# Altium PCB DRVS-PCB.PcbDoc (part 1 of 3)
Units mm, origin at the board's own origin, x right, y up, seen from the top; angles counter-clockwise.
Board outline 50.67 x 58.05 mm, 4 copper layers (Top Layer, Layer 1, Layer 2, Bottom Layer), stack 1.553 mm thick; 72 components, 76 nets, 302 pads, 127 vias.
Unrouted connection lines stored in the file: 20.
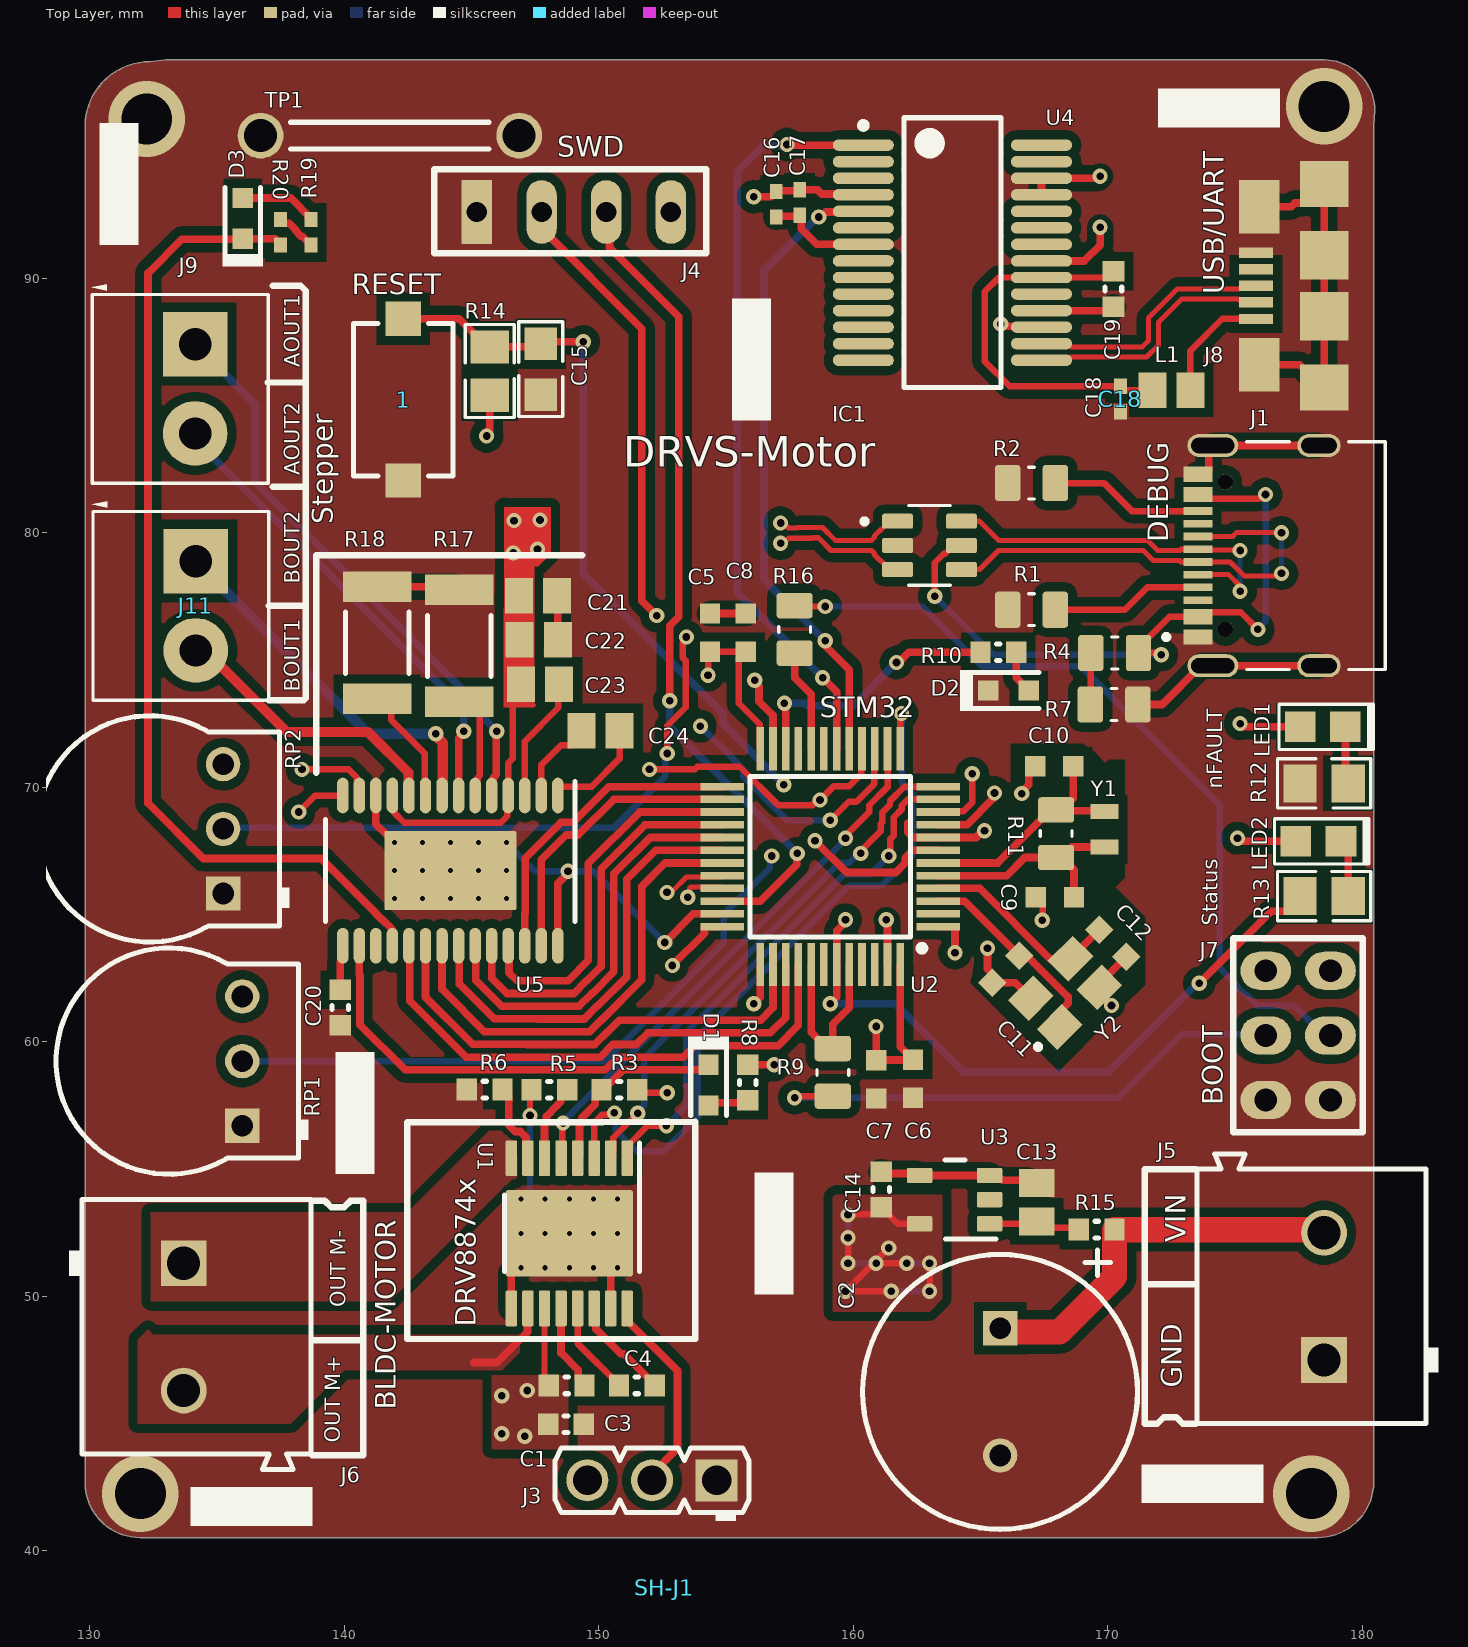
[diagram p0: Top Layer view]
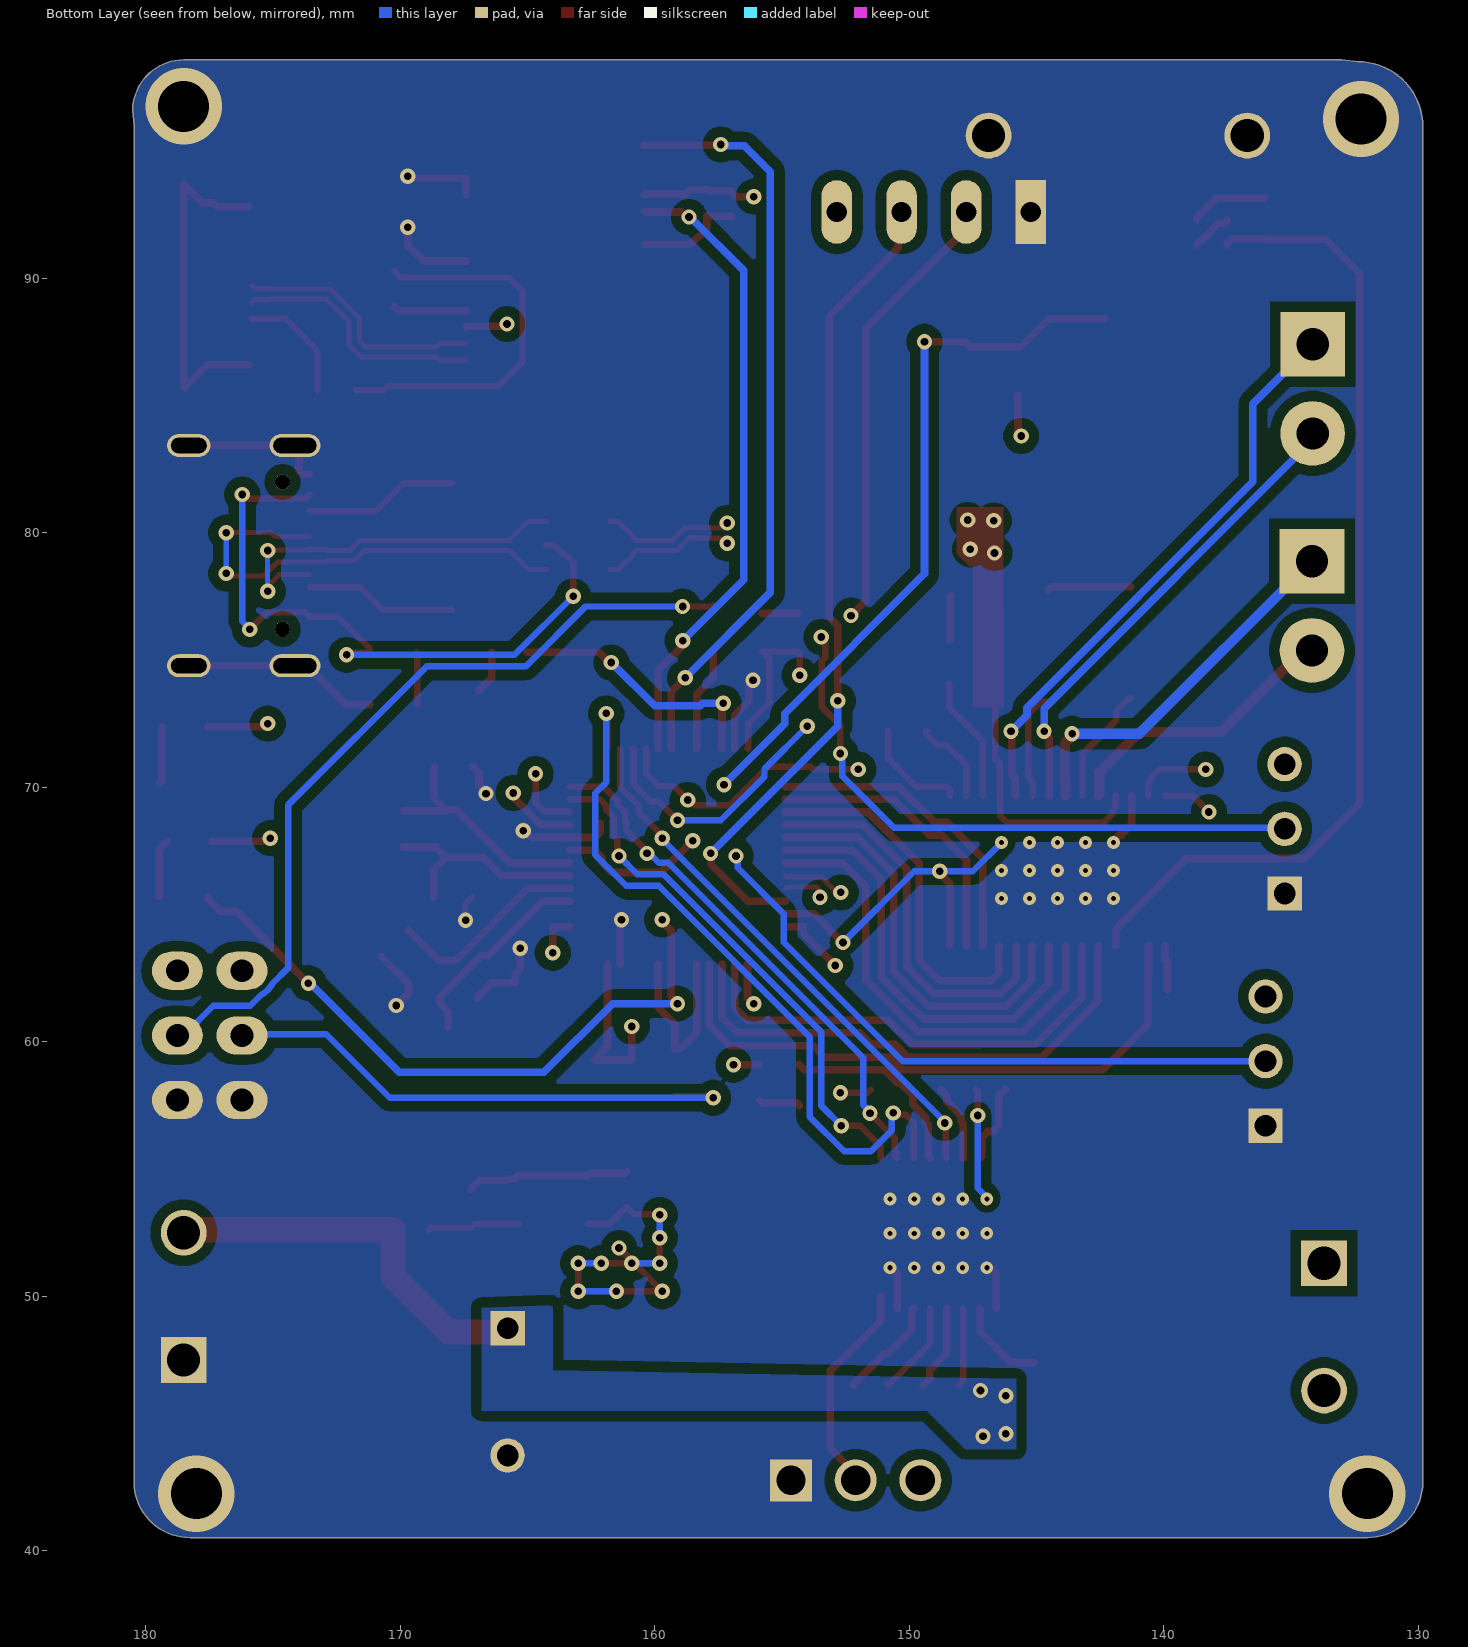
[diagram p1: Bottom Layer view, seen from below]
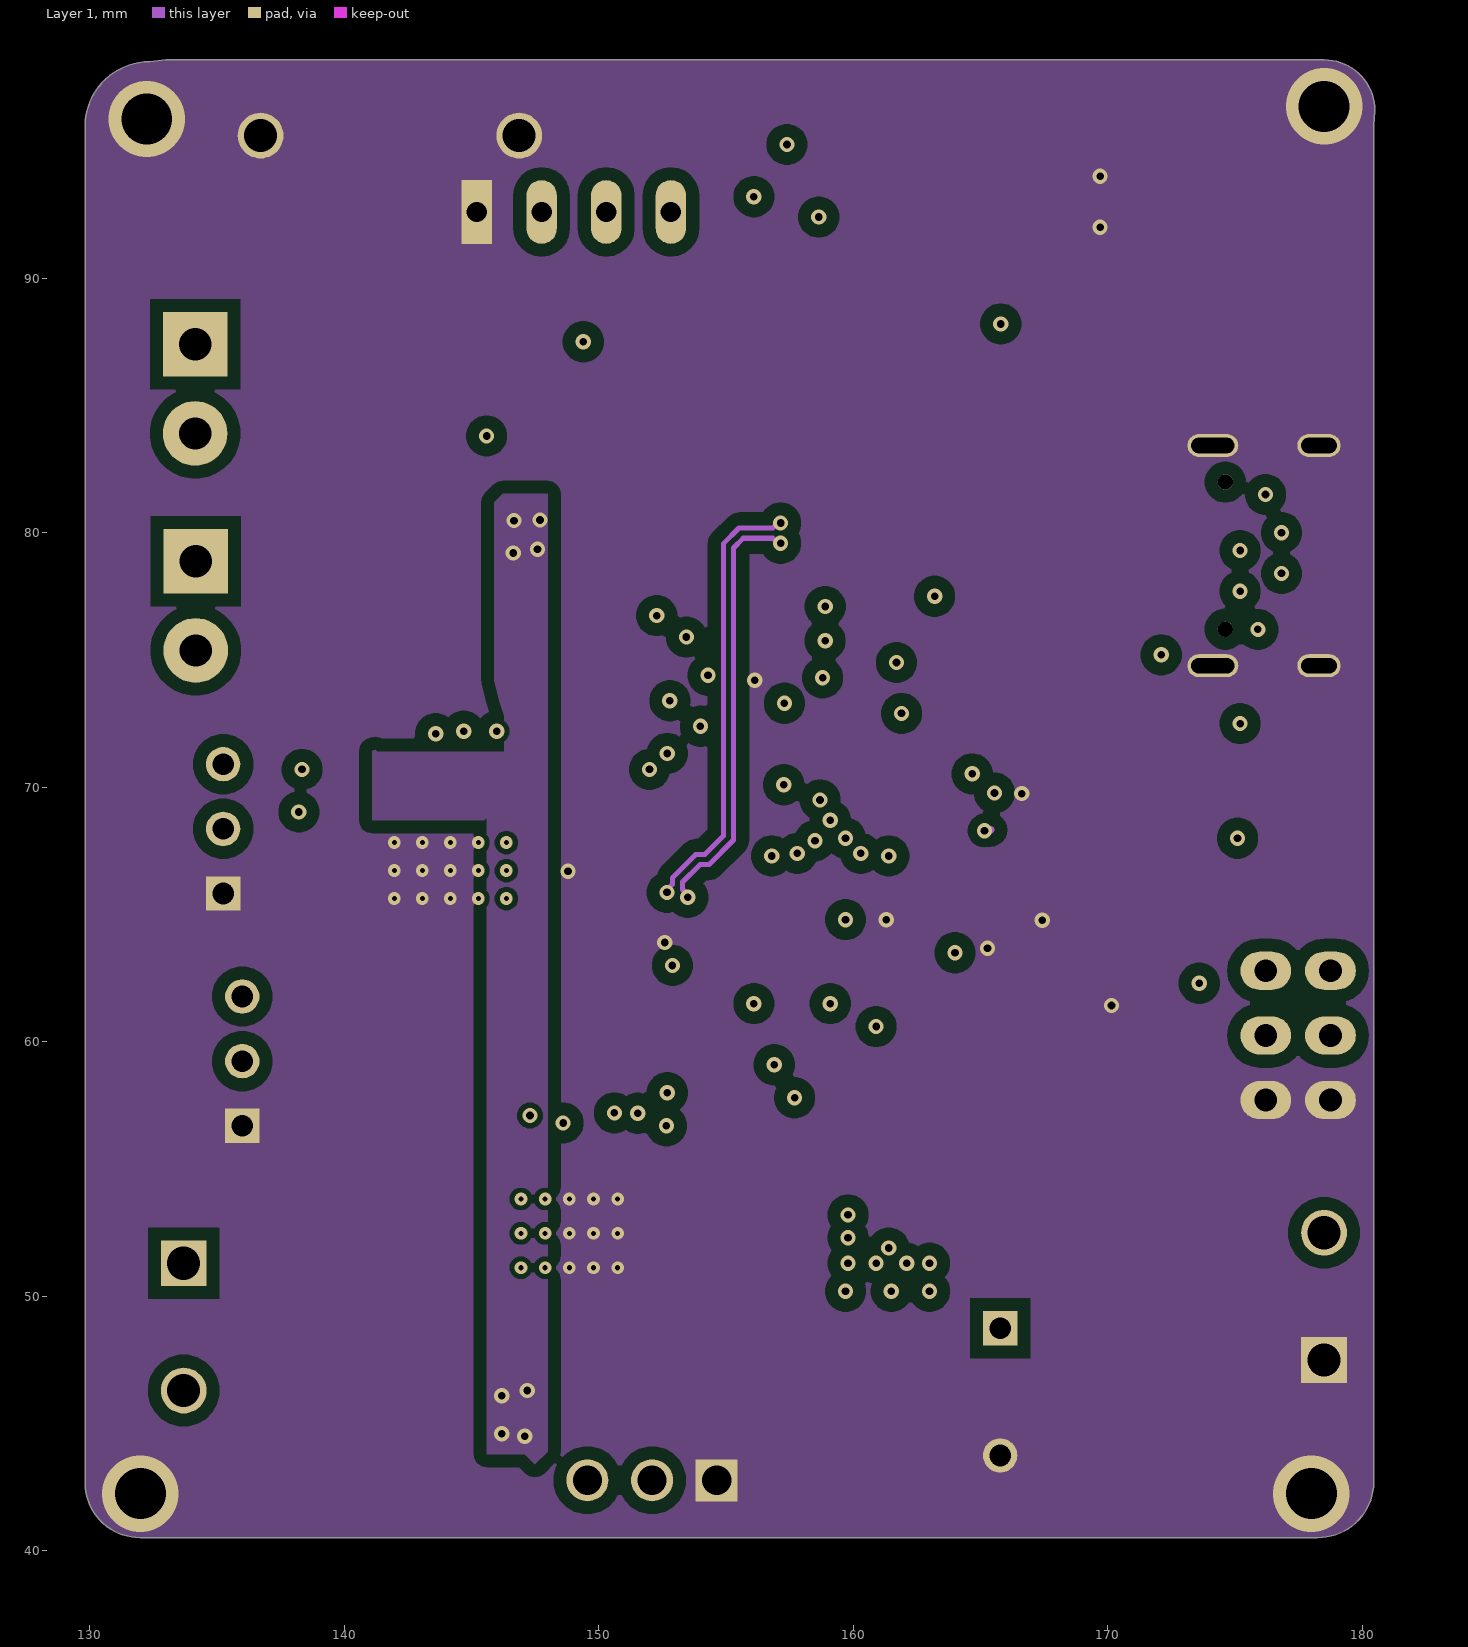
[diagram p2: Layer 1]
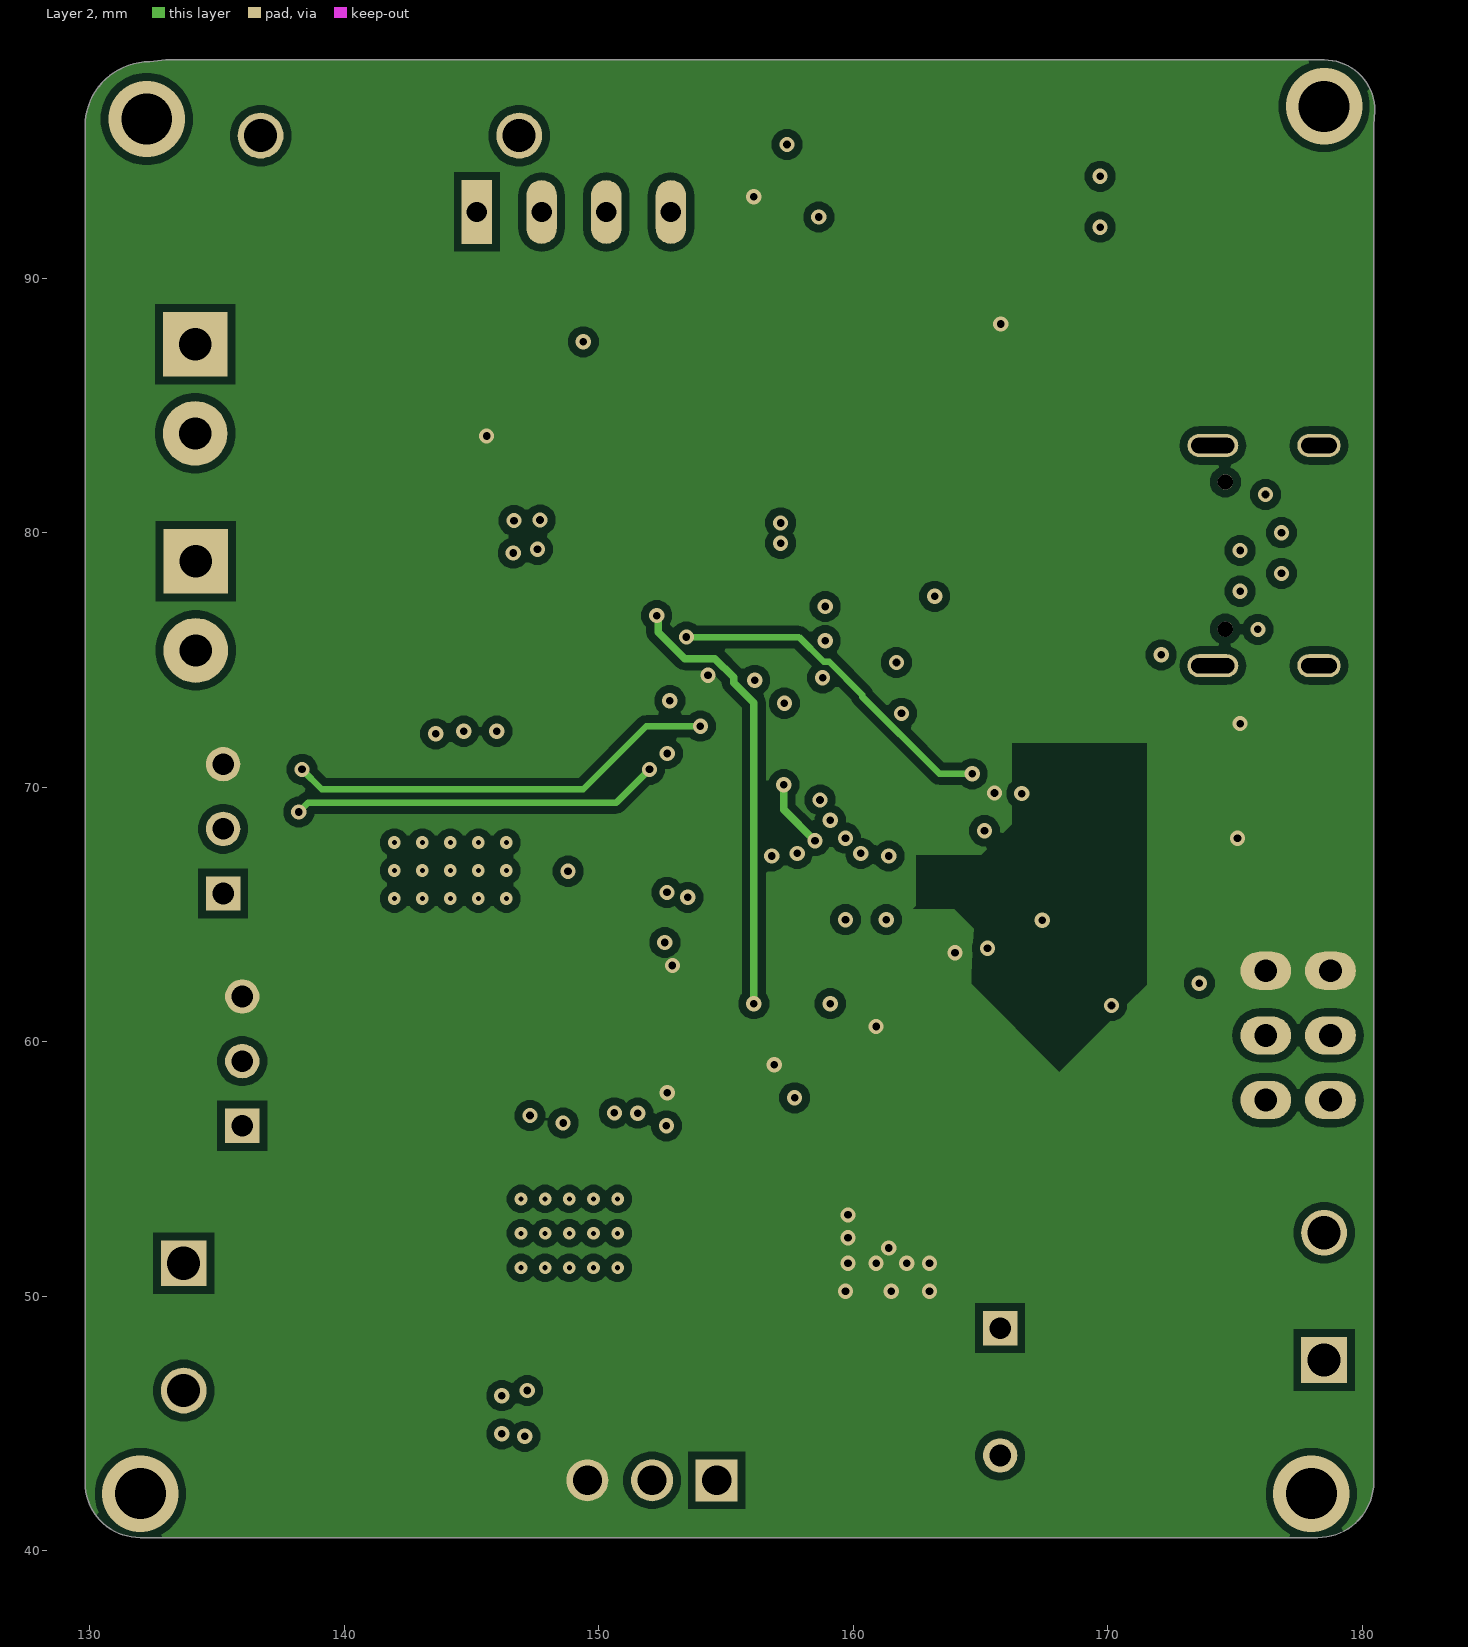
[diagram p3: Layer 2]
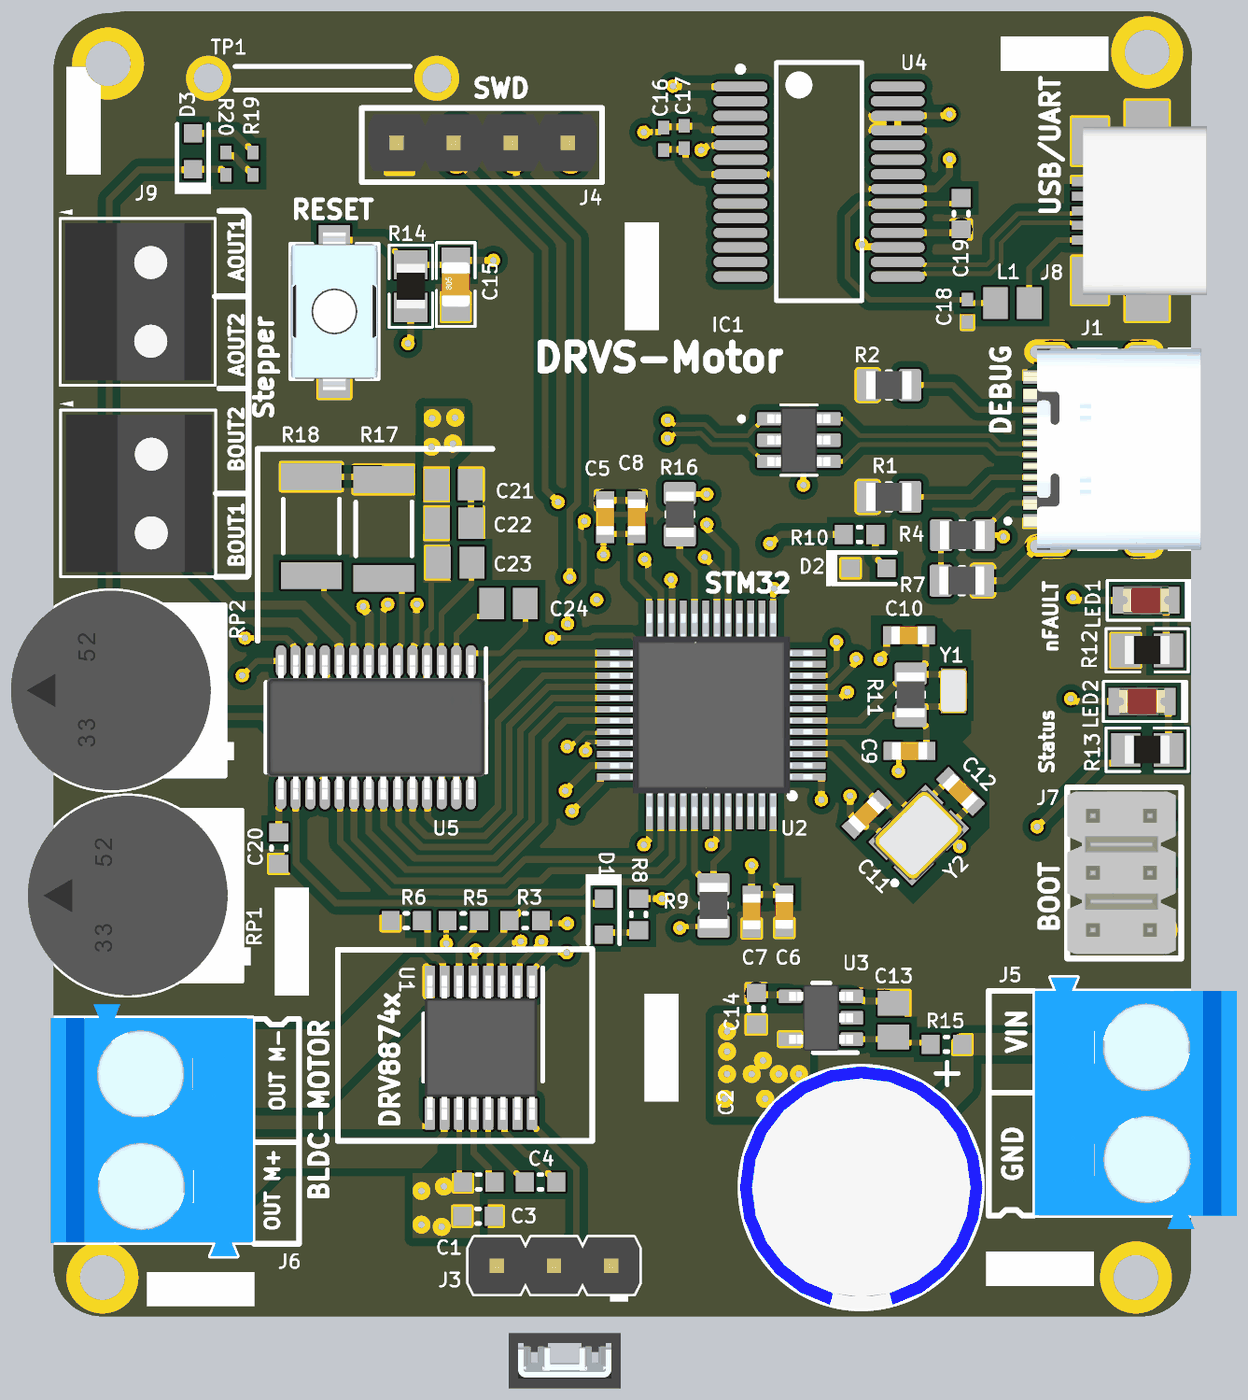
[diagram p5: 3D render of the assembled board from above, using the file's embedded part models]

## Layer stack, top to bottom
Top Solder: solder mask 0.0102, Solder Resist, Dk 3.5
Top Layer: signal copper 0.0711
Dielectric 2: prepreg 0.2896, FR4 370, Dk 3.8
Layer 1: signal copper 0.035
Dielectric 1: dielectric 0.762, FR4 370, Dk 4.8
Layer 2: signal copper 0.035
Dielectric 3: prepreg 0.2896, FR4 370, Dk 3.8
Bottom Layer: signal copper 0.0711
Bottom Solder: solder mask 0.0102, Solder Resist, Dk 3.5

## Board outline
129.825,42.675 ccw(c131.987,42.687) 132,40.525 178.25,40.525 ccw(c178.263,42.712) 180.45,42.7 180.45,96 180.5,96.575 ccw(c178.5,96.575) 178.5,98.575 133,98.575 132.365,98.5 ccw(c132.365,95.96) 129.825,95.96

## Design rules (kind name [scope] priority, off if disabled: settings)
Clearance BOT-L4 [InNamedPolygon('GND_L04_P020')] p1: gap=0.4 ignorepadtopadclearanceinfootprint=FALSE
Clearance inner-L3-VCC [InNamedPolygon('VCC_L03_P019')] p2: gap=0.3 ignorepadtopadclearanceinfootprint=FALSE
Clearance INNER-L2 [InNamedPolygon('GND_L02_P017')] p3: gap=0.5 ignorepadtopadclearanceinfootprint=FALSE
Clearance TOP-L1 [InNamedPolygon('GND_L01_P016')] p4: gap=0.35 ignorepadtopadclearanceinfootprint=FALSE
Clearance [All] p5: gap=0.2 ignorepadtopadclearanceinfootprint=TRUE
DiffPairsRouting DiffPair_DiffPairsRouting [InDifferentialPairClass('DIFFPAIR-90-USB')] p1: maxlimit=0.2 minlimit=0.2 mostfreqgap=0.2 toplayer_minwidth=0.2 toplayer_maxwidth=0.2 toplayer_prefwidth=0.2 midlayer1_minwidth=0.2 midlayer1_maxwidth=0.2 midlayer1_prefwidth=0.2 midlayer2_minwidth=0.2 midlayer2_maxwidth=0.2 midlayer2_prefwidth=0.2 bottomlayer_minwidth=0.2 bottomlayer_maxwidth=0.2 bottomlayer_prefwidth=0.2 maxuncoupledlength=12.7
DiffPairsRouting DiffPair_DiffPairsRouting_1 [InDifferentialPairClass('Diff-90-USB')] p2: maxlimit=0.2 minlimit=0.2 mostfreqgap=0.2 toplayer_minwidth=0.2 toplayer_maxwidth=0.2 toplayer_prefwidth=0.2 midlayer1_minwidth=0.2 midlayer1_maxwidth=0.2 midlayer1_prefwidth=0.2 midlayer2_minwidth=0.2 midlayer2_maxwidth=0.2 midlayer2_prefwidth=0.2 bottomlayer_minwidth=0.2 bottomlayer_maxwidth=0.2 bottomlayer_prefwidth=0.2 maxuncoupledlength=12.7
DiffPairsRouting DiffPair_DiffPairsRouting_2 [InDifferentialPairClass('Diff-90-USB')] p3: maxlimit=0.254 minlimit=0.254 mostfreqgap=0.254 toplayer_minwidth=0.381 toplayer_maxwidth=0.381 toplayer_prefwidth=0.381 midlayer1_minwidth=0.381 midlayer1_maxwidth=0.381 midlayer1_prefwidth=0.381 midlayer2_minwidth=0.381 midlayer2_maxwidth=0.381 midlayer2_prefwidth=0.381 bottomlayer_minwidth=0.381 bottomlayer_maxwidth=0.381 bottomlayer_prefwidth=0.381 maxuncoupledlength=12.7
DiffPairsRouting [All] p4: maxlimit=0.254 minlimit=0.254 mostfreqgap=0.254 toplayer_minwidth=0.381 toplayer_maxwidth=0.381 toplayer_prefwidth=0.381 midlayer1_minwidth=0.381 midlayer1_maxwidth=0.381 midlayer1_prefwidth=0.381 midlayer2_minwidth=0.381 midlayer2_maxwidth=0.381 midlayer2_prefwidth=0.381 bottomlayer_minwidth=0.381 bottomlayer_maxwidth=0.381 bottomlayer_prefwidth=0.381 maxuncoupledlength=12.7
HoleSize [All] p1: absolutevalues=TRUE maxlimit=2 minlimit=0.1 maxpercent=80.000 minpercent=20.000
HoleToHoleClearance [All] p1: gap=0.1 allowstackedmicrovias=TRUE
MatchedLengths DiffPair_MatchedLengths [InDifferentialPairClass('DIFFPAIR-90-USB')] p1: tolerance=25.4 checknetsindiffpair=FALSE checkdiffpairvsdiffpair=TRUE checkxsignals=TRUE checkothers=TRUE
MatchedLengths DiffPair_MatchedLengths_1 [InDifferentialPairClass('Diff-90-USB')] p2: tolerance=25.4 checknetsindiffpair=FALSE checkdiffpairvsdiffpair=TRUE checkxsignals=TRUE checkothers=TRUE
MatchedLengths DiffPair_MatchedLengths_2 [InDifferentialPairClass('Diff-90-USB')] p3: tolerance=25.4 checknetsindiffpair=FALSE checkdiffpairvsdiffpair=TRUE checkxsignals=TRUE checkothers=TRUE
MinimumSolderMaskSliver [All] p1: minsoldermaskwidth=0.005
NetAntennae [All] p1: netantennaetolerance=0.1
PlaneClearance [All] p1: clearance=0.1
PlaneConnect [All] p1: planeconnectstyle=Direct reliefexpansion=0.508 reliefentries=4 reliefconductorwidth=0.254 reliefairgap=0.254
PolygonConnect [All] p1: connectstyle=Direct reliefconductorwidth=0.254 reliefentries=4 polygonreliefangle="90 Angle" airgapwidth=0.254
RoutingVias [All] p1: holewidth=0.3 width=0.6 viastyle="Through Hole" minholewidth=0.3 minwidth=0.6 maxholewidth=0.3 maxwidth=0.6
SilkToSilkClearance [All] p1: silktosilkclearance=0.01
SilkToSolderMaskClearance [IsPad] p1: minsilkscreentomaskgap=0.005 clearancetoexposedcopper=TRUE
SolderMaskExpansion [All] p1: expansion=0.102 istentingtop=FALSE
Width [All] p1: maxlimit=2 minlimit=0.254 preferedwidth=0.254
21 further rules are at their usual default settings.

## Classes and differential pairs
differential pair class DIFFPAIR-90-USB: USB
differential pair class Diff-90-USB: D USB_Con_C1
component class "usb sheet": C16 C17 C18 C19 J8 L1 U4
component class stepper-schematic: C20 C21 C22 C23 C24 C25 D3 J9 J11 R17 R18 R19 R20 TP1 U5 U6
component class DRVS-SCHEMA: 1 C1 C2 C3 C4 C5 C6 C7 C8 C9 C10 C11 C12 C13 C14 C15 D1 D2 IC1 J1 J3 J4 J5 J6 J7 LED1 LED2 R1 R2 R3 R4 R5 R6 R7 R8 R9 R10 R11 R12 R13 R14 R15 R16 RP1 RP2 SH-J1 U1 U2 U3 Y1 Y2
differential pair USB: +USB_P -USB_N
differential pair USB_Con_C1: +USB_Con_C1_P -USB_Con_C1_N
differential pair D: +D_P -D_N

## Components (designator, comment, footprint, x,y, rotation, side; value= is the part's Value field where it differs from the comment)
1 "434113025826" WS-TASV_L6W3.8H2.5_4341x30258x6 142.325,85.225 r90 top
C1 "885012206095" 0603L 148.746,46.5 r0 top value=0.1uF
C2 "UBT1H101MPD1TD" BT_1000x1250 165.775,46.25 r270 top value=100uF
C3 "885012206095" 0603L 148.72,44.975 r0 top value=0.1uF
C4 "885012206091" 0603L 151.5,46.5 r0 top value=0.022uF
C5 "0.1uF" WCAP-CSST_0603_L1.6W0.8H0.8_Reflow 154.375,76.075 r270 top
C6 "0.1uF" WCAP-CSST_0603_L1.6W0.8H0.8_Reflow 162.35,58.55 r90 top
C7 "0.1uF" WCAP-CSST_0603_L1.6W0.8H0.8_Reflow 160.9,58.525 r90 top
C8 "0.1uF" WCAP-CSST_0603_L1.6W0.8H0.8_Reflow 155.775,76.075 r270 top
C9 "12pF" WCAP-CSST_0603_L1.6W0.8H0.8_Reflow 167.925,65.675 r0 top
C10 "12pF" WCAP-CSST_0603_L1.6W0.8H0.8_Reflow 167.9,70.819 r0 top
C11 "12pF" WCAP-CSST_0603_L1.6W0.8H0.8_Reflow 166,62.85 r45 top
C12 "12pF" WCAP-CSST_0603_L1.6W0.8H0.8_Reflow 170.2,63.875 r135 top
C13 "885012207103" 0805L 167.213,53.7 r90 top value=1uF
C14 "C0603C475K8PACTU" 0603L 161.1,54.2 r90 top value=4.7uF
C15 "0.1uF" CAP_0805 147.725,86.425 r90 top
C16 "GRM155R61A105KE15D" 0402L 156.975,92.9 r270 top value=1uF
C17 "GRM155R61A104KA01D" 0402L 157.9,92.975 r270 top value=0.1uF
C18 "GRM155R61A104KA01D" 0402L 170.5,85.25 r270 top value=0.1uF
C19 "CGB3B1X5R1A475K055AC" 0603L 170.225,89.575 r270 top value=4.7uF
C20 "C0603C474K9RACTU" 0603L 139.85,61.35 r270 top value=0.47uF
C21 "C0805C104K1RACTU" 0805L 147.625,77.525 r180 top value=0.1uF
C22 "C0805C104K1RACTU" 0805L 147.65,75.8 r180 top value=0.1uF
C23 "C2012X7R1E474K" 0805L 147.7,74.05 r180 top value=0.47uF
C24 "C0805C104K1RACTU" 0805L 150.075,72.225 r180 top value=0.1uF
D1 "150060RS75000" WL-SMCW_RED 154.318,58.3 r270 top value=Red
D2 "150060VS75000" WL-SMCW_GREEN 166.1,73.8 r0 top value=Green
D3 "150060RS75000" WL-SMCW_RED 136.025,92.35 r90 top value=Red
IC1 "USBLC6-2SC6" SOT95P280X145-6N 163,79.5 r0 top
J1 "TYPE-C-31-M-12" HRO_TYPE-C-31-M-12 178.3,79.1 r90 top
J3 "61300311121" WURTH_61300311121 152.1,42.776 r180 top
J4 "4X1 Bergstrip" CON4_100_40D72_TH_ST_MALE 145.22,92.6 r90 top
J5 "CMP-0054828-1" Wurth_691101710002 178.5,50 r90 top
J6 "CMP-0054828-1" Wurth_691101710002 133.7,48.8 r270 top
J7 "2X3 Berg Strip" CON6_100_59D78_TH_ST_Duplicate 176.21,62.79 r270 top
J8 "ZX62-B-5PA(11)" CONN_USB_micro_ZX62-B-5PA 175.825,89.7 r90 top
J9 "ED555/2DS" TERM_BLK_ED555-2DS 134.15,87.405 r270 top
J11 "ED555/2DS" TERM_BLK_ED555-2DS 134.175,78.88 r270 top
L1 "MMZ2012R300A" 0805L 172.5,85.6 r0 top value="30 ohm"
LED1 "RED LED" LED_0805 178.45,72.375 r180 top
LED2 "RED LED" LED_0805 178.275,67.875 r180 top
R1 "5.1k" RESC2012X65N 167.006,76.975 r180 top
R2 "5.1k" RESC2012X65N 167.006,81.95 r0 top
R3 "ERA-3ARW103V" 0603L 150.816,58.12 r180 top value=10.0k
R4 "10k" RESC2012X65N 170.275,75.275 r180 top
R5 "CRCW06031K50JNEA" 0603L 148.061,58.12 r0 top value=1.5k
R6 "ERJ-3GEY0R00V" 0603L 145.524,58.125 r0 top value=0
R7 "10k" RESC2012X65N 170.25,73.25 r0 top
R8 "CRCW0603330RJNEA" 0603L 155.864,58.4 r270 top value=330
R9 "10K" RESC2012X65N 159.2,58.8 r270 top
R10 "CRCW0603330RJNEA" 0603L 165.7,75.3 r0 top value=330
R11 "10MΩ" RESC2012X65N 167.975,68.175 r90 top
R12 "1K" RES_0805 178.5,70.15 r180 top
R13 "1K" RES_0805 178.5,65.725 r180 top
R14 "10K" RES_0805 145.725,86.35 r90 top
R15 "ERJ-3GEY0R00V" 0603L 169.567,52.625 r180 top value=0
R16 "10K" RESC2012X65N 157.7,76.2 r270 top
R17 "CSRN2010FKR250" 2010L 144.525,75.55 r270 top value=0.25
R18 "CSRN2010FKR250" 2010L 141.3,75.675 r270 top value=0.25
R19 "CRCW0402510RJNED" 0402L 138.7,91.8 r270 top value=510
R20 "CRCW04024K99FKED" 0402L 137.5,91.8 r90 top value=4.99k
RP1 "3352T-1-503LF" Bourns_3352T 136,59.24 r90 top value=50k
RP2 "3352T-1-503LF" Bourns_3352T 135.25,68.365 r90 top value=50k
SH-J1 "60900213421" Wurth_60900213421 152.575,38.55 r0 top
TP1 "D3082-05" Harwin_D3082-05 141.8,95.6 r0 top
U1 "DRV8874PWPR" PWP0016J_N 148.849,52.475 r270 top
U2 "STM32F103C8T6" LQFP-48_19.6_393_58X11_SMD 159.1,67.275 r180 top
U3 "TPS7B6933DBVR" DBV0005A_N 163.984,53.8 r180 top
U4 "FT232RL" SSOP28_M 163.9,91 r0 top
U5 "DRV8880PWPR" PWP0028C_N 144.175,66.725 r270 top
Y1 "32.768kHz" WE-XTAL_IQXC-25 169.875,68.35 r90 top
Y2 "25MHz" WE-XTAL_CFPX-180 168.325,61.925 r45 top

## Footprints (in the part's own frame and the unit in brackets; to place one, negate y for a bottom-side part, rotate by r counter-clockwise, add the part's x,y. Pads: shape width x height; smd on the part's side, far side on the other; paste and mask are expansions set on the pad)
0402L [mm]
  rect 0.6x0.5 smd: 1(-0.5,0) 2(0.5,0)
  body extent -0.55,-0.3 0.55,0.3, height 0.6
0603L [mm]
  rect 0.8x0.85 smd: 1(-0.7,0) 2(0.7,0)
  silkscreen extent -0.07,-0.32 0.07,0.32, body extent -0.87,-0.47 0.87,0.47, height 1
0805L [mm]
  rect 1.1x1.4 smd: 1(-0.75,0) 2(0.75,0)
  body extent -1.1,-0.72 1.1,0.72, height 1.45
2010L [mm]
  rect 1.2x2.7 smd: 1(-2.2,0) 2(2.2,0)
  silkscreen extent -1.2,-1.25 1.2,1.25, body extent -2.73,-1.45 2.73,1.45, height 1.66
Bourns_3352T [mm]
  rect 1.35x1.35 hole 0.85: 1(-2.54,0)
  round 1.35 hole 0.85: 2(0,0) 3(2.54,0)
  silkscreen extent -4.44,-2.6 4.44,7.31, body extent -4.44,-2.21 4.45,7.32, height 3.81
BT_1000x1250 [mm]
  rect 1.35x1.35 hole 0.85 paste+0: 1(-2.5,0)
  round 1.35 hole 0.85 paste+0: 2(2.5,0)
  silkscreen extent -5.58,-5.4 5.4,5.4, body extent -5.36,-5.39 5.39,5.39, height 14.51
CAP_0805 [mm] "Ceramic Capacitor"
  rect 1.27x1.27 smd mask+0.076: 1(-1,0) 2(1,0)
  silkscreen extent -1.86,-0.86 1.86,0.86, body extent -1,-0.62 1,0.63, height 0.78
CON4_100_40D72_TH_ST_MALE [mm] "Berg Strip"
  rect 2.5x1.2 hole 0.8: 1(0,0)
  oval 2.5x1.2 hole 0.8: 2(0,-2.54) 3(0,-5.08) 4(0,-7.62)
  silkscreen extent -1.63,-9.02 1.68,1.68, body extent -1.14,-8.76 1.4,1.4, height 8.55
CON6_100_59D78_TH_ST_Duplicate [mm] "Berg strip"
  oval 1.5x2 hole 0.9: 1(0,0) 2(0,2.54) 3(2.54,0) 4(2.54,2.54) 5(5.08,0) 6(5.08,2.54)
  silkscreen extent -1.27,-1.27 6.35,3.81, body extent -1.07,-1.27 6.15,3.56, height 8.18
CONN_USB_micro_ZX62-B-5PA [mm]
  rect 0.4x1.35 smd: 1(-1.3,0) 2(-0.65,0) 3(0,0) 4(0.65,0) 5(1.3,0)
  rect 1.9x1.9 smd: 6(-1.2,-2.675) 7(1.2,-2.675)
  rect 1.8x1.9 smd: 8(-4,-2.675) 9(4,-2.675)
  rect 2.1x1.6 smd: 10(-3.1,-0.125) 11(3.1,-0.125)
  body extent -3.75,-5.33 3.75,0.18, height 2.55
DBV0005A_N [mm]
  rrect17% 1x0.6 smd: 1(-1.375,0.95) 2(-1.375,0) 3(-1.375,-0.95) 4(1.375,-0.95) 5(1.375,0.95)
  silkscreen extent -1.62,-1.55 0.38,1.55, body extent -1.42,-1.46 1.42,1.46, height 1.09
Harwin_D3082-05 [mm]
  round 1.8 hole 1.3: 1(-5.08,0) 2(5.08,0)
  silkscreen extent -3.9,-0.53 3.9,0.53, body extent -5.6,-0.52 5.61,0.52, height 6.63
HRO_TYPE-C-31-M-12 [mm]
  rect 0.6x1.14 smd mask+0.05: A1_B12(-3.2,4.75) A4_B9(-2.4,4.75) B1_A12(3.2,4.75) B4_A9(2.4,4.75)
  rect 0.3x1.14 smd mask+0.05: A5(-1.25,4.75) A6(-0.25,4.75) A7(0.25,4.75) A8(1.25,4.75) B5(1.75,4.75) B6(0.75,4.75) B7(-0.75,4.75) B8(-1.75,4.75)
  oval 0.9x2 hole 0.6 slot 1.7 at 90 deg: S1(-4.325,4.17) S2(4.325,4.17)
  oval 0.9x1.7 hole 0.6 slot 1.4 at 90 deg: S3(-4.325,0) S4(4.325,0)
  round 0.6 hole 0.6 unplated: ""(-2.89,3.68) ""(2.89,3.68)
  silkscreen extent -4.47,-2.6 4.47,6.1, body extent -4.47,-2.6 4.47,5.31, height 3.31
LED_0805 [mm] "LED"
  rect 1.2x1.2 smd mask+0.076: A(0.889,0) K(-0.889,0)
  silkscreen extent -1.99,-0.89 1.73,0.89, body extent -1.01,-0.62 1.01,0.63, height 1.1
LQFP-48_19.6_393_58X11_SMD [mm] "48LQFP"
  rect 1.7x0.3 smd mask+0.076: 1(-4.238,2.75) 2(-4.238,2.25) 3(-4.238,1.75) 4(-4.238,1.25) 5(-4.238,0.75) 6(-4.238,0.25) 7(-4.238,-0.25) 8(-4.238,-0.75) 9(-4.238,-1.25) 10(-4.238,-1.75) 11(-4.238,-2.25) 12(-4.238,-2.75) 25(4.238,-2.75) 26(4.238,-2.25) 27(4.238,-1.75) 28(4.238,-1.25) 29(4.238,-0.75) 30(4.238,-0.25) 31(4.238,0.25) 32(4.238,0.75) 33(4.238,1.25) 34(4.238,1.75) 35(4.238,2.25) 36(4.238,2.75)
  rect 0.3x1.7 smd mask+0.076: 13(-2.75,-4.238) 14(-2.25,-4.238) 15(-1.75,-4.238) 16(-1.25,-4.238) 17(-0.75,-4.238) 18(-0.25,-4.238) 19(0.25,-4.238) 20(0.75,-4.238) 21(1.25,-4.238) 22(1.75,-4.238) 23(2.25,-4.238) 24(2.75,-4.238) 37(2.75,4.238) 38(2.25,4.238) 39(1.75,4.238) 40(1.25,4.238) 41(0.75,4.238) 42(0.25,4.238) 43(-0.25,4.238) 44(-0.75,4.238) 45(-1.25,4.238) 46(-1.75,4.238) 47(-2.25,4.238) 48(-2.75,4.238)
  silkscreen extent -3.72,-3.15 3.15,3.72, body extent -4.5,-4.5 4.5,4.5, height 1.7
PWP0016J_N [mm]
  rrect22% 1.4x0.45 smd: 1(-2.95,2.275) 2(-2.95,1.625) 3(-2.95,0.975) 4(-2.95,0.325) 5(-2.95,-0.325) 6(-2.95,-0.975) 7(-2.95,-1.625) 8(-2.95,-2.275) 9(2.95,-2.275) 10(2.95,-1.625) 11(2.95,-0.975) 12(2.95,-0.325) 13(2.95,0.325) 14(2.95,0.975) 15(2.95,1.625) 16(2.95,2.275)
  rrect6% 3.4x5 smd paste-1.7 mask-1.7: 17(0,0)
  rrect50% 2.46x3.55 on Top Paste: 17(0,0)
  rrect50% 2.46x3.55 on Top Solder: 17(0,0)
  silkscreen extent -3.55,-2.55 1.5,2.75, body extent -3.2,-2.5 3.2,2.5, height 1.13
PWP0028C_N [mm]
  rrect100% 1.4x0.45 smd: 1(-2.95,4.225) 2(-2.95,3.575) 3(-2.95,2.925) 4(-2.95,2.275) 5(-2.95,1.625) 6(-2.95,0.975) 7(-2.95,0.325) 8(-2.95,-0.325) 9(-2.95,-0.975) 10(-2.95,-1.625) 11(-2.95,-2.275) 12(-2.95,-2.925) 13(-2.95,-3.575) 14(-2.95,-4.225) 15(2.95,-4.225) 16(2.95,-3.575) 17(2.95,-2.925) 18(2.95,-2.275) 19(2.95,-1.625) 20(2.95,-0.975) 21(2.95,-0.325) 22(2.95,0.325) 23(2.95,0.975) 24(2.95,1.625) 25(2.95,2.275) 26(2.95,2.925) 27(2.95,3.575) 28(2.95,4.225)
  rrect3% 3.1x5.18 smd: 29(0,0)
  silkscreen extent -3.5,-4.9 2,4.9, body extent -3.21,-4.85 3.21,4.85, height 0.98
RES_0805 [mm] "Resister"
  rect 1.3x1.5 smd mask+0.076: 1(0.95,0) 2(-0.95,0)
  silkscreen extent -1.83,-0.97 1.83,0.97, body extent -1,-0.63 1,0.62, height 0.5
RESC2012X65N [mm]
  rrect25% 1x1.42 smd: 1(-0.935,0) 2(0.935,0)
  silkscreen extent -0.12,-0.63 0.12,0.63, body extent -1,-0.63 1,0.63, height 0.65
SOT95P280X145-6N [mm]
  rrect25% 1.21x0.59 smd: 1(-1.255,0.95) 2(-1.255,0) 3(-1.255,-0.95) 4(1.255,-0.95) 5(1.255,0) 6(1.255,0.95)
  silkscreen extent -2.65,-1.57 0.81,1.56, body extent -1.4,-1.46 1.4,1.46, height 1.42
SSOP28_M [mm]
  oval 2.4x0.45 smd: 1(-3.5,4.225) 2(-3.5,3.575) 3(-3.5,2.925) 4(-3.5,2.275) 5(-3.5,1.625) 6(-3.5,0.975) 7(-3.5,0.325) 8(-3.5,-0.325) 9(-3.5,-0.975) 10(-3.5,-1.625) 11(-3.5,-2.275) 12(-3.5,-2.925) 13(-3.5,-3.575) 14(-3.5,-4.225) 15(3.5,-4.225) 16(3.5,-3.575) 17(3.5,-2.925) 18(3.5,-2.275) 19(3.5,-1.625) 20(3.5,-0.975) 21(3.5,-0.325) 22(3.5,0.325) 23(3.5,0.975) 24(3.5,1.625) 25(3.5,2.275) 26(3.5,2.925) 27(3.5,3.575) 28(3.5,4.225)
  silkscreen extent -3.62,-5.3 1.9,5.3, body extent -2.7,-5.3 2.7,5.3, height 2
TERM_BLK_ED555-2DS [mil]
  rect 100x100 hole 50: 1(0,0)
  round 100 hole 50: 2(138,0)
  silkscreen extent -93,-161 215,113, body extent -69,-150 207,106, height 323
WCAP-CSST_0603_L1.6W0.8H0.8_Reflow [mm]
  rect 0.8x0.8 smd: 1(-0.75,0) 2(0.75,0)
  body extent -0.8,-0.4 0.8,0.4, height 0.8
WE-XTAL_CFPX-180 [mm]
  rect 1.4x1.15 smd: 1(-1.1,-0.8) 2(1.1,-0.8) 3(1.1,0.8) 4(-1.1,0.8)
  silkscreen extent -2.35,-0.85 -2.15,-0.65, body extent -1.7,-1.35 1.7,1.35, height 0.65
WE-XTAL_IQXC-25 [mm]
  rect 0.6x1.1 smd: 1(-0.7,0) 2(0.7,0)
  body extent -1,-0.6 1,0.6, height 0.55
WL-SMCW_GREEN [mm]
  rect 0.8x0.8 smd: 1(-0.8,0) 2(0.8,0)
  silkscreen extent -1.9,-0.8 1.2,0.8, body extent -0.85,-0.45 0.85,0.45, height 0.8
WL-SMCW_RED [mm]
  rect 0.8x0.8 smd: 1(-0.8,0) 2(0.8,0)
  silkscreen extent -1.9,-0.8 1.2,0.8, body extent -0.85,-0.45 0.85,0.45, height 0.8
WS-TASV_L6W3.8H2.5_4341x30258x6 [mm]
  rect 1.35x1.4 smd: 1(-3.175,0) 2(3.175,0)
  silkscreen extent -3,-1.95 3,1.95, body extent -3.5,-1.95 3.5,1.95, height 2.5
Wurth_60900213421 [mil]
  round 1 on Mech3: 0(0,0)
  body extent -98,-48 98,48, height 236
WURTH_61300311121 [mm]
  rect 1.65x1.65 hole 1.15: 1(-2.54,0)
  round 1.65 hole 1.15: 2(0,0) 3(2.54,0)
  silkscreen extent -3.81,-1.27 3.81,1.6, body extent -3.81,-1.27 3.81,1.27, height 8.54
Wurth_691101710002 [mm]
  rect 1.8x1.8 hole 1.3: 1(-2.5,0)
  round 1.8 hole 1.3: 2(2.5,0)
  silkscreen extent -5,-4.5 5.6,5, body extent -5.6,-4 5.6,5, height 12.5

## Part data
1: library part BUTTON, "WS-TASV J-Bend SMT Tact Switch, L6 x W3.8 x H2.5mm, 260g, SPST-NO, 12V, 50mA", Manufacturer="Wurth Elektronik", Operating Temperature Max=85°C, Operating Temperature Min=-40°C, Rated Current=50mA, Rated Voltage (DC)=12V, Category="Tact Switches", Circuit=SPST-NO, ComponentLink1Description="Website Link", ComponentLink1URL=https://www.we-online.com/redexpert/article/434113025826?ad, ComponentLink2Description="Datasheet Link", ComponentLink2URL=https://www.we-online.com/redexpert/spec/434113025826?ad, Contact Material="Stainless Steel", Contact Plating=Silver, Height=2.5mm, Length=6mm, Manufacturer Part Number=434113025826, Match Code=WS-TASV, Mount="Surface Mount", Operation Force=260g, Packaging="Tape and Reel", Terminal Material="Copper Alloy", Terminal Plating=Silver, Washable=No, Width=3.8mm
C1 C3: library part CMP-0006837-4, "CAP, CERM, 0.1 uF, 50 V, +/- 10%, X7R, 0603", Cap_Case=0603, Manufacturer="Wurth Elektronik", TempCo=X7R, Tolerance_%=10%, Value1=Unknown, Value2=50V, ValueDisplayed=0.1uF, AEC Category=Q200, AEC Grade=N/A, AEC Qualified=N, Cap_F=100nF, ComponentLink1Description="Datasheet link", ComponentLink1URL=http://katalog.we-online.de/pbs/datasheet/885012206095.pdf, CompType=Capacitor, LatestRevisionDate=2017-03-09, MountType=SMT, PackageReference=0603, PartNumber=885012206095, Polarized=N, Published=2008-06-19, Publisher="Texas Instruments", RoHS=Y, SizeArea_mm2=1.28, SizeAreaWB_mm2=4.68, SizeX_mm=1.6, SizeY_mm=0.8, SizeZ_mm=1, TaMax_C=125°C, TaMin_C=-55°C, Technology=Ceramic, U/M=EA, VDC_V=50V
C2: library part CMP-0009918-2, "CAP, AL, 100 uF, 50 V, +/- 20%, TH", Cap_Case=10x12.5mm, Manufacturer=Nichicon, Supplier Part Number 1=493-4508-1-ND, Tolerance_%=20%, Value1=Unknown, Value2=50V, ValueDisplayed=100uF, AEC Category=Q200, AEC Grade=N/A, AEC Qualified=N, Cap_F=100µF, ComponentLink1Description="Datasheet link", ComponentLink1URL=http://nichicon-us.com/english/products/pdfs/e-ubt.pdf, CompType=Capacitor, IRMS_A=5.55dA, LatestRevisionDate=2017-03-09, MountType=TH, PackageReference="Cap, 10x12.5mm", PartNumber=UBT1H101MPD1TD, Polarized=Y, Publisher="Texas Instruments", RoHS=Y, Series=BT, SizeArea_mm2=100, SizeAreaWB_mm2=144, SizeX_mm=10, SizeY_mm=10, SizeZ_mm=14.5, Supplier 1=Digi-Key, Supplier 2=Newark, Supplier 3=Mouser, Supplier Part Number 2=26T5990, Supplier Part Number 3=647-UBT1H101MPD1TD, TaMax_C=125°C, TaMin_C=-40°C, Technology=AL, U/M=EA, VDC_V=50V
C4: library part CMP-0006836-4, "CAP, CERM, 0.022 uF, 50 V, +/- 10%, X7R, 0603", Cap_Case=0603, Manufacturer="Wurth Elektronik", TempCo=X7R, Tolerance_%=10%, Value1=Unknown, Value2=50V, ValueDisplayed=0.022uF, AEC Category=Q200, AEC Grade=N/A, AEC Qualified=N, Cap_F=22nF, ComponentLink1Description="Datasheet link", ComponentLink1URL=http://katalog.we-online.de/pbs/datasheet/885012206091.pdf, CompType=Capacitor, LatestRevisionDate=2017-03-09, MountType=SMT, PackageReference=0603, PartNumber=885012206091, Polarized=N, Published=2008-06-19, Publisher="Texas Instruments", RoHS=Y, SizeArea_mm2=1.28, SizeAreaWB_mm2=4.68, SizeX_mm=1.6, SizeY_mm=0.8, SizeZ_mm=1, TaMax_C=125°C, TaMin_C=-55°C, Technology=Ceramic, U/M=EA, VDC_V=50V
C5 C6 C7 C8: library part "0.1uF capacitor", "WCAP-CSST Multilayer Ceramic Chip Capacitor, Soft Termination, size 0603, X7R Class II, 220pF, 50VDC", Capacitance=220pF, Capacitance Tolerance=+/-10%, Case/Size Code=0603, Insulation Resistance=10GΩ, Manufacturer="Wurth Elektronik", Manufacturer Part Number=885382206001, Operating Temperature Max=125°C, Operating Temperature Min=-55°C, Rated Voltage (DC)=50V, Category="Multilayer Ceramic Chip Capacitors", Ceramic Type="X7R Class II", ComponentLink1Description="Website Link", ComponentLink1URL=https://www.we-online.com/redexpert/article/885382206001?ad, ComponentLink2Description="Datasheet Link", ComponentLink2URL=https://www.we-online.com/redexpert/spec/885382206001?ad, Dissipation Factor=2.5%, Height=0.8mm, Length=1.6mm, Match Code=WCAP-CSST, Mount="Surface Mount", Packaging="Tape and Reel", Technical Reference=X7R0603221K050DFCT1S000, Width=0.8mm
C9 C10 C11 C12: library part "0.1uF capacitor_4", "WCAP-CSST Multilayer Ceramic Chip Capacitor, Soft Termination, size 0603, X7R Class II, 220pF, 50VDC", Capacitance=220pF, Capacitance Tolerance=+/-10%, Case/Size Code=0603, Insulation Resistance=10GΩ, Manufacturer="Wurth Elektronik", Manufacturer Part Number=885382206001, Operating Temperature Max=125°C, Operating Temperature Min=-55°C, Rated Voltage (DC)=50V, Category="Multilayer Ceramic Chip Capacitors", Ceramic Type="X7R Class II", ComponentLink1Description="Website Link", ComponentLink1URL=https://www.we-online.com/redexpert/article/885382206001?ad, ComponentLink2Description="Datasheet Link", ComponentLink2URL=https://www.we-online.com/redexpert/spec/885382206001?ad, Dissipation Factor=2.5%, Height=0.8mm, Length=1.6mm, Match Code=WCAP-CSST, Mount="Surface Mount", Packaging="Tape and Reel", Technical Reference=X7R0603221K050DFCT1S000, Width=0.8mm
C13: library part CMP-0007696-2, "CAP, CERM, 1 uF, 50 V, +/- 10%, X7R, 0805", Cap_Case=0805, Manufacturer="Wurth Elektronik", Supplier Part Number 1=710-885012207103, TempCo=X7R, Tolerance_%=10%, Value1=Unknown, Value2=50V, ValueDisplayed=1uF, AEC Category=Q200, AEC Grade=N/A, AEC Qualified=N, Cap_F=1µF, ComponentLink1Description="Datasheet link", ComponentLink1URL=http://katalog.we-online.de/pbs/datasheet/885012207103.pdf, CompType=Capacitor, LatestRevisionDate=2017-03-09, MountType=SMT, PackageReference=0805, PartNumber=885012207103, Polarized=N, Published=2008-06-19, Publisher="Texas Instruments", RoHS=Y, SizeArea_mm2=2.5, SizeAreaWB_mm2=6.75, SizeX_mm=2, SizeY_mm=1.25, SizeZ_mm=1.45, Supplier 1=Mouser, TaMax_C=125°C, TaMin_C=-55°C, Technology=Ceramic, U/M=EA, VDC_V=50V
C14: library part CMP-0006949-5, "CAP, CERM, 4.7 uF, 10 V, +/- 10%, X5R, 0603", Cap_Case=0603, Manufacturer=Kemet, Supplier Part Number 1=399-5503-1-ND, TempCo=X5R, Tolerance_%=10%, Value1="0.006 ohm", Value2=10V, ValueDisplayed=4.7uF, AEC Category=Q200, AEC Qualified=?, Cap_F=4.7µF, ComponentLink1Description="Datasheet link", ComponentLink1URL=http://www.kemet.com/kemet/web/homepage/kechome.nsf/vapubfiles/F3102_Y5V.pdf/$file/F3102_Y5V.pdf, CompType=Capacitor, ESR_ohm=6m, IRMS_A=7.24A, LatestRevisionDate=2017-03-09, MountType=SMT, PackageReference=0603, PartNumber=C0603C475K8PACTU, Polarized=N, Published=2008-06-19, Publisher="Texas Instruments", RoHS=Y, SizeArea_mm2=1.28, SizeAreaWB_mm2=4.68, SizeX_mm=1.6, SizeY_mm=0.8, SizeZ_mm=1, Supplier 1=Digi-Key, Supplier 2=Mouser, Supplier 3=Farnell, Supplier Part Number 2=80-C0603C475K8P, Supplier Part Number 3=1572625, TaMax_C=85°C, TaMin_C=-55°C, Technology=Ceramic, U/M=EA, VDC_V=10V
C15: library part CAP_0.1uF-50V-5%-0805, "0.1µF ±5% 50V Ceramic Capacitor X7R 0805 (2012 Metric)", Case/Package="0805 (2012 Metric)", Manufacturer=KEMET, Manufacturing Part Number=C0805C104J5RACTU, Supplier Part Number-1=399-1171-1-ND, Supplier-1=Digikey
C16: "CAP, CERM, 1 µF, 10 V, +/- 10%, X5R, 0402", Cap_Case=0402, Manufacturer=MuRata, Supplier Part Number 1=490-3890-1-ND, TempCo=X5R, Tolerance_%=10, Value1=Unknown, Value2=10V, ValueDisplayed=1µF, Cap_F=0.000001, ComponentLink1Description="Datasheet link", ComponentLink1URL=http://search.murata.co.jp/Ceramy/PnsearchViewAction.do?HnOFG=ON&HnNFG=ON&SEL_CNT=50&sLang=en&sKey=GRM155R61A105KE15D&x=9&y=9&search=startwith, CompType=Capacitor, LatestRevisionDate=2015-06-10, MountType=SMT, PackageReference=0402, PartNumber=GRM155R61A105KE15D, Polarized=N, Published=2008-06-19, Publisher="Texas Instruments", RoHS=Y, Supplier 1=Digi-Key, Supplier 2=Mouser, Supplier 3=Farnell, Supplier Part Number 2=81-GRM155R61A105KE15, Supplier Part Number 3=1735523, SymbolVersion=2008-07-09, TaMax_C=85, TaMin_C=-55, Technology=Ceramic, U/M=EA, VDC_V=10
C17 C18: "CAP, CERM, 0.1 µF, 10 V, +/- 10%, X5R, 0402", Cap_Case=0402, Manufacturer=MuRata, Supplier Part Number 1=490-1318-1-ND, TempCo=X5R, Tolerance_%=10, Value1=Unknown, Value2=10V, ValueDisplayed=0.1µF, Cap_F=0.0000001, ComponentLink1Description="Datasheet link", ComponentLink1URL=http://search.murata.co.jp/Ceramy/PnsearchViewAction.do?HnOFG=ON&HnNFG=ON&SEL_CNT=50&sLang=en&sKey=GRM155R61A104KA01D&x=9&y=9&search=startwith, CompType=Capacitor, LatestRevisionDate=2015-06-10, MountType=SMT, PackageReference=0402, PartNumber=GRM155R61A104KA01D, Polarized=N, Published=2008-06-19, Publisher="Texas Instruments", RoHS=Y, Supplier 1=Digi-Key, Supplier 2=Mouser, Supplier 3=Farnell, Supplier Part Number 2=81-GRM155R61A104KA01, Supplier Part Number 3=1828862, SymbolVersion=2008-07-09, TaMax_C=85, TaMin_C=-55, Technology=Ceramic, U/M=EA, VDC_V=10
C19: "CAP, CERM, 4.7 µF, 10 V, +/- 10%, X5R, 0603", Cap_Case=0603, Manufacturer=TDK, Supplier Part Number 1=445-7482-1-ND, TempCo=X5R, Tolerance_%=10, Value1=Unknown, Value2=10V, ValueDisplayed=4.7µF, Cap_F=0.0000047, ComponentLink1Description="Datasheet link", ComponentLink1URL=http://www.tdk.com/pdf/mlcc_product_guide_A12.pdf, CompType=Capacitor, LatestRevisionDate=2015-06-10, MountType=SMT, PackageReference=0603, PartNumber=CGB3B1X5R1A475K055AC, Polarized=N, Published=2008-06-19, Publisher="Texas Instruments", RoHS=Y, Supplier 1=Digi-Key, SymbolVersion=2008-07-09, TaMax_C=85, TaMin_C=-55, Technology=Ceramic, U/M=EA, VDC_V=10
C20: "CAP, CERM, 0.47 µF, 6.3 V, +/- 10%, X7R, 0603", Cap_Case=0603, Manufacturer=Kemet, Supplier Part Number 1=399-4924-1-ND, TempCo=X7R, Tolerance_%=10, Value1=Unknown, Value2=6.3V, ValueDisplayed=0.47µF, Cap_F=0.00000047, ComponentLink1Description="Datasheet link", ComponentLink1URL=http://www.kemet.com/kemet/web/homepage/kechome.nsf/vapubfiles/F3102_Y5V.pdf/$file/F3102_Y5V.pdf, CompType=Capacitor, LatestRevisionDate=2015-06-10, MountType=SMT, PackageReference=0603, PartNumber=C0603C474K9RACTU, Polarized=N, Published=2008-06-19, Publisher="Texas Instruments", RoHS=Y, Supplier 1=Digi-Key, Supplier 2=Mouser, Supplier Part Number 2=80-C0603C474K9R, SymbolVersion=2008-07-09, TaMax_C=125, TaMin_C=-55, Technology=Ceramic, U/M=EA, VDC_V=6.3
C21 C22 C24: "CAP, CERM, 0.1 µF, 100 V, +/- 10%, X7R, 0805", Cap_Case=0805, Manufacturer=Kemet, Supplier Part Number 1=399-3486-1-ND, TempCo=X7R, Tolerance_%=10, Value1="0.064 ohm", Value2=100V, ValueDisplayed=0.1µF, Cap_F=0.0000001, ComponentLink1Description="Datasheet link", ComponentLink1URL=http://www.kemet.com/kemet/web/homepage/kechome.nsf/file/Partial%20Copy%20-%20Ceramic%20Surface%20Mount%20Capacitors/$file/F3102_CE.pdf, CompType=Capacitor, ESR_ohm=0.064, IRMS_A=1.64, LatestRevisionDate=2015-06-10, MountType=SMT, PackageReference=0805, PartNumber=C0805C104K1RACTU, Polarized=N, Published=2008-06-19, Publisher="Texas Instruments", RoHS=Y, Supplier 1=Digi-Key, Supplier 2=Mouser, Supplier 3=Farnell, Supplier Part Number 2=80-C0805C104K1R, Supplier Part Number 3=1650862, SymbolVersion=2008-07-09, TaMax_C=125, TaMin_C=-55, Technology=Ceramic, U/M=EA, VDC_V=100
C23: "CAP, CERM, 0.47 µF, 25 V, +/- 10%, X7R, 0805", Cap_Case=0805, Manufacturer=TDK, Supplier Part Number 1=445-1353-1-ND, TempCo=X7R, Tolerance_%=10, Value1="0.0101 ohm", Value2=25V, ValueDisplayed=0.47µF, Cap_F=0.00000047, ComponentLink1Description="Datasheet link", ComponentLink1URL=http://www.tdk.co.jp/tefe02/e412_c.pdf, CompType=Capacitor, ESR_ohm=0.0101, LatestRevisionDate=2015-06-10, MountType=SMT, PackageReference=0805, PartNumber=C2012X7R1E474K, Polarized=N, Published=2008-06-19, Publisher="Texas Instruments", RoHS=Y, Supplier 1=Digi-Key, Supplier 2=Farnell, Supplier Part Number 2=1844282, SymbolVersion=2008-07-09, TaMax_C=125, TaMin_C=-55, Technology=Ceramic, U/M=EA, VDC_V=25
D1 D3: library part CMP-0002947-2, "LED, Red, SMD", Color=Red, Manufacturer="Wurth Elektronik", Power_TotalModule=72mW, Supplier Part Number 1=732-4978-1-ND, Value1=0.072W, Value2=2V, Angle=140, ComponentLink1Description="Datasheet link", ComponentLink1URL=http://katalog.we-online.de/led/datasheet/150060RS75000.pdf, CompType=LED, Io_A=30mA, LatestRevisionDate=2017-03-09, MountType=SMT, PackageReference=LED_0603, PartNumber=150060RS75000, Published=2008-07-11, Publisher="Texas Instruments", RoHS=Y, Supplier 1=Digi-Key, Supplier 2=Newark, Supplier 3=Mouser, Supplier Part Number 2=95W3795, Supplier Part Number 3=710-150060RS75000, TJmax_C=85°C, Type=AlInGaP, U/M=EA, Vf_V=2V, Vr_V=5V
D2: library part CMP-0002894-1, "LED, Green, SMD", Color=green, Manufacturer="Wurth Elektronik", Supplier Part Number 1=732-4980-1-ND, Value1=W, Value2=2V, ComponentLink1Description="Datasheet link", ComponentLink1URL=http://katalog.we-online.de/led/datasheet/150060VS75000.pdf, CompType=LED, Io_A=20mA, LatestRevisionDate=2017-03-09, MountType=SMT, PackageReference=LED_0603, PartNumber=150060VS75000, Published=2008-07-11, Publisher="Texas Instruments", RoHS=Y, Supplier 1=Digi-Key, Supplier 2=Newark, Supplier 3=Farnell, Supplier Part Number 2=95W3797, Supplier Part Number 3=2322073, Type=AlInGaP, U/M=EA, Vf_V=2V
IC1: "Integrated Circuit", Manufacturer_Name=STMicroelectronics, Mouser Part Number=511-USBLC6-2SC6, Arrow Part Number=USBLC6-2SC6, Arrow Price/Stock=https://www.arrow.com/en/products/usblc6-2sc6/stmicroelectronics?region=europe, Datasheet Link=http://www.st.com/st-web-ui/static/active/en/resource/technical/document/datasheet/CD00050750.pdf, Height=1.45mm, Manufacturer_Part_Number=USBLC6-2SC6, Mouser Price/Stock=https://www.mouser.co.uk/ProductDetail/STMicroelectronics/USBLC6-2SC6?qs=po45yt2pPpu%2FhNIlwQdTlg%3D%3D
J1: "USB Connectors 24 Receptacle 1 8.94*7.3mm RoHS", Package=Package, Availability="Not in stock", Check_prices=https://www.snapeda.com/parts/TYPE-C-31-M-12/HRO+Electronics+Co.%252C+Ltd./view-part/?ref=eda, MF="HRO Electronics Co., Ltd.", MP=TYPE-C-31-M-12, Price=None, SnapEDA_Link=https://www.snapeda.com/parts/TYPE-C-31-M-12/HRO+Electronics+Co.%252C+Ltd./view-part/?ref=snap
J3: library part CMP-0054796-1, "Header, 2.54 mm, 3x1, Gold, TH", Manufacturer="Wurth Elektronik", Supplier Part Number 1=732-5316-ND, ClassName=Header, CNHeader=TRUE, ComponentLink1Description="Datasheet URL", ComponentLink1URL=http://katalog.we-online.de/em/datasheet/6130xx11121.pdf, CompType=Header, CT=FALSE, Green_EU RoHS=Passed, Green_EU RoHS-2=Incomplete, Green_Lifecycle=Active, Green_REACh=Passed, LatestRevisionDate=26/05/2017, MountType=TH, PackageReference="Header, 2.54mm, 3x1, TH", PartNumber=61300311121, Publisher="Texas Instruments", RoHS=Y, Supplier 1=Digi-Key, Supplier 2=Newark, Supplier 3=Farnell, Supplier Part Number 2=20X0950, Supplier Part Number 3=356154
J4: library part CON-BS-PLG_4X1-100-TH-ST, "4 pin, 1 row, 2.54mm pitch bergstrip", Case/Package=TH, Manufacturer=NA, Manufacturing Part Number=NA, Supplier Part Number-1=NA, Supplier-1=NA
J5 J6: "Terminal Block, 5 mm, 2x1, Tin, TH", Manufacturer="Wurth Elektronik", PartNumber="691 101 710 002", Supplier Part Number 1=732-2026-ND, CNHeader=FALSE, ComponentLink1Description="Datasheet URL", ComponentLink1URL=http://katalog.we-online.de/em/datasheet/6911017100xx.pdf, CompType="Terminal Block", CT=TRUE, Green_EU RoHS=Passed, Green_EU RoHS-2=Incomplete, Green_Lifecycle=Active, Green_REACh=Passed, LatestRevisionDate=26/05/2017, MountType=TH, PackageReference="Terminal Block, 5 mm, 2x1, TH", Publisher="Texas Instruments", RoHS=Y, Supplier 1=Digi-Key, Supplier 2=Mouser, Supplier Part Number 2=710-691101710002
J7: library part CON-BS-PLG_2X3-100-TH-ST, "6 pin, 2 row, 2.54mm pitch bergstrip", Case/Package=TH, Manufacturer=NA, Manufacturer Part Number=NA, Supplier Part Number-1=NA, Supplier-1=NA
J8: "Connector, Receptacle, Micro-USB Type B, R/A, Bottom Mount SMT", Manufacturer="Hirose Electric Co. Ltd.", Supplier Part Number 1=H11634CT-ND, ComponentLink1Description="Datasheet Link", ComponentLink1URL=http://www.hirose.co.jp/cataloge_hp/e24200011.pdf, CompType=Receptacle, LatestRevisionDate=2015-06-10, MountType=SMT, PackageReference="Micro USB-B receptacle", PartNumber=ZX62-B-5PA(11), Publisher="Texas Instruments", RoHS=Y, Supplier 1=Digi-Key, Supplier 2=Mouser, Supplier 3=Farnell, Supplier Part Number 2=798-ZX62-B-5PA11, Supplier Part Number 3=1645325, SymbolCreator=a0411947, SymbolVersion=2013-04-05, U/M=EA
J9 J11: "Terminal Block, 6A, 3.5mm Pitch, 2-Pos, TH", Manufacturer="On-Shore Technology", Supplier Part Number 1=ED1514-ND, ComponentLink1Description="Datasheet Link", ComponentLink1URL=http://on-shore.com/sites/default/files/manuals/ed555ds.pdf, CompType=Connector, LatestRevisionDate=2015-06-10, MountType=TH, PackageReference=7.0x8.2x6.5mm, PartNumber=ED555/2DS, Publisher="Texas Instruments", RoHS=Y, Supplier 1=Digi-Key, SymbolCreator=a0412235, SymbolVersion=2013-10-31, U/M=EA
L1: library part MMZ2012R300A_2, "Ferrite Bead, 30 ohm @ 100 MHz, 1.5 A, 0805", Manufacturer=TDK, Supplier Part Number 1=445-2199-1-ND, Value1="0.05 ohm", Value2=1.5A, ComponentLink1Description="Datasheet link", ComponentLink1URL=http://www.tdk.co.jp/tefe02/e9412_mmz.pdf, CompType="Ferrite Bead", DCR_ohm=0.05, Imax_A=1.5, LatestRevisionDate=2015-06-08, MountType=SMT, PackageReference=0805, PartNumber=MMZ2012R300A, Published=2014-04-30, Publisher="Texas Instruments", RoHS=Y, Supplier 1=Digi-Key, Supplier 2=Mouser, Supplier 3=Farnell, Supplier Part Number 2=810-MMZ2012R300A, Supplier Part Number 3=1669723, SymbolVersion=2009-06-02, ZTyp@100MHz_Ohm=30
LED1 LED2: library part LED-RED_10mA-0805, "Red 621nm LED Indication - Discrete 2V 0805 (2012 Metric)", Case/ Package=0805, Manufacturer="Lite-On Inc.", Manufacturer Part Number=LTST-C170EKT, Supplier Part Number-1=160-1178-1-ND, Supplier-1=Digikey
R1 R2 R4 R7: library part resisitor, "Fixed Resistors", Package=0805, Availability="In Stock", Check_prices=https://www.snapeda.com/parts/CRG0805F33R/TE+Connectivity+Passive+Product/view-part/?ref=eda, EU_RoHS_Compliance="Compliant with Exemptions", MF="TE Connectivity", MP=CRG0805F33R, Price=None, Purchase-URL=https://pricing.snapeda.com/search/part/CRG0805F33R/?ref=eda, SnapEDA_Link=https://www.snapeda.com/parts/CRG0805F33R/TE+Connectivity+Passive+Product/view-part/?ref=snap
R3: library part RES-10K-0603, "RES, 10.0 k, 0.05%, 0.1 W, AEC-Q200 Grade 0, 0603", Manufacturer=Panasonic, Power_W=100mW, TempCo="10 ppm/C", Tolerance_%=0.05%, Value2=0.1W, Value_Code=10k0, ValueDisplayed=10.0k, AEC Category=Q200, AEC Grade=0, AEC Qualified=Y, ComponentLink1Description="Datasheet link", ComponentLink1URL=https://industrial.panasonic.com/cdbs/www-data/pdf/RDM0000/AOA0000C307.pdf, CompType=Resistor, MountType=SMT, PackageReference=0603, PartNumber=ERA-3ARW103V, Res_ohm=10k, RoHS=Y, SizeArea_mm2=1.28, SizeAreaWB_mm2=4.68, SizeX_mm=1.6, SizeY_mm=0.8, SizeZ_mm=1, Technology="Thin Film", Value1=0.05%
R5: library part CMP-0025733-4, "RES, 1.5 k, 5%, 0.1 W, AEC-Q200 Grade 0, 0603", Manufacturer=Vishay-Dale, Power_W=100mW, Supplier Part Number 1=541-1.5KGCT-ND, TempCo="200 ppm/C", Tolerance_%=5%, Value2=0.1W, Value_Code=1k50, ValueDisplayed=1.5k, AEC Category=Q200, AEC Grade=0, AEC Qualified=Y, ComponentLink1Description="Datasheet link", ComponentLink1URL=http://www.vishay.com/docs/20035/dcrcwe3.pdf, CompType=Resistor, EIA_Code=E24, MountType=SMT, PackageReference=0603, PartNumber=CRCW06031K50JNEA, Res_ohm=1.5k, RoHS=E, SizeArea_mm2=1.28, SizeX_mm=1.6, SizeY_mm=0.8, SizeZ_mm=1, Supplier 1=Digi-Key, Supplier 2=Newark, Supplier 3=Mouser, Supplier Part Number 2=59M6753, Supplier Part Number 3=71-CRCW0603J-1.5K-E3, Technology="Thick Film", Value1=5%, VDC_V=75V
R6 R15: library part CMP-0025874-3, "RES, 0, 5%, 0.1 W, 0603", Manufacturer=Panasonic, Power_W=100mW, Supplier Part Number 1=P0.0GCT-ND, TempCo="600 ppm/C", Tolerance_%=5%, Value2=0.1W, Value_Code=0000, ValueDisplayed=0, AEC Category=Q200, AEC Qualified=?, ComponentLink1Description="Datasheet link", ComponentLink1URL=http://www.panasonic.com/industrial/components/pdf/AOA0000CE1.pdf, CompType=Resistor, EIA_Code=E24, LatestRevisionDate=2017-03-09, MountType=SMT, PackageReference=0603, PartNumber=ERJ-3GEY0R00V, Published=2008-06-26, Publisher="Texas Instruments", Res_ohm=0, RoHS=Y, SizeArea_mm2=1.28, SizeX_mm=1.6, SizeY_mm=0.8, SizeZ_mm=1, Supplier 1=Digi-Key, Supplier 2=Mouser, Supplier 3=Farnell, Supplier Part Number 2=667-ERJ-3GEY0R00V, Supplier Part Number 3=2059527, Technology="Thick Film", U/M=EA, Value1=5%, VDC_V=50V
R8 R10: library part CMP-0025785-4, "RES, 330, 5%, 0.1 W, AEC-Q200 Grade 0, 0603", Manufacturer=Vishay-Dale, Power_W=100mW, Supplier Part Number 1=541-330GCT-ND, TempCo="200 ppm/C", Tolerance_%=5%, Value2=0.1W, Value_Code=330R, ValueDisplayed=330, AEC Category=Q200, AEC Grade=0, AEC Qualified=Y, ComponentLink1Description="Datasheet link", ComponentLink1URL=http://www.vishay.com/docs/20035/dcrcwe3.pdf, CompType=Resistor, EIA_Code=E24, MountType=SMT, PackageReference=0603, PartNumber=CRCW0603330RJNEA, Res_ohm=330, RoHS=E, SizeArea_mm2=1.28, SizeX_mm=1.6, SizeY_mm=0.8, SizeZ_mm=1, Supplier 1=Digi-Key, Supplier 2=Newark, Supplier 3=Mouser, Supplier Part Number 2=59M6805, Supplier Part Number 3=71-CRCW0603J-330-E3, Technology="Thick Film", Value1=5%, VDC_V=75V
R9 R11 R16: library part resisitor_3, "Fixed Resistors", Package=0805, Availability="In Stock", Check_prices=https://www.snapeda.com/parts/CRG0805F33R/TE+Connectivity+Passive+Product/view-part/?ref=eda, EU_RoHS_Compliance="Compliant with Exemptions", MF="TE Connectivity", MP=CRG0805F33R, Price=None, Purchase-URL=https://pricing.snapeda.com/search/part/CRG0805F33R/?ref=eda, SnapEDA_Link=https://www.snapeda.com/parts/CRG0805F33R/TE+Connectivity+Passive+Product/view-part/?ref=snap
R12 R13: library part RES_1K-0.125W-1%-0805, "1 kOhms ±1% 0.125W, 1/8W Chip Resistor 0805 (2012 Metric) Moisture Resistant Thick Film", Case/Package=0805, Manufacturer=垈㎵á, Manufacturer Part Number=RC0805FR-071KL, Supplier Part Number-1=311-1.00KCRCT-ND, Supplier-1=Digikey
R14: library part RES_10K-0.125W-1%-0805, "10 kOhms ±1% 0.125W, 1/8W Chip Resistor 0805 (2012 Metric) Moisture Resistant Thick Film", Case/Package=0805, Manufacturer=Yageo, Manufacturing Part Number=RC0805FR-0710KL, Supplier Part Number-1=311-10.0KCRCT-ND, Supplier-1=Digikey
R17 R18: "RES, 0.25, 1%, 1 W, 2010", Manufacturer="Stackpole Electronics Inc", Power_W=1, Supplier Part Number 1=CSRN2010FKR250CT-ND, TempCo="250 ppm/C", Value1=1%, Value2=1W, Value_Code=R250, ValueDisplayed=0.25, ComponentLink1Description="Datasheet link", ComponentLink1URL=http://www.seielect.com/Catalog/SEI-csr.pdf, CompType=Resistor, LatestRevisionDate=2015-04-13, MountType=SMT, PackageReference=2010, PartNumber=CSRN2010FKR250, Published=2008-06-26, Publisher="Texas Instruments", Res_ohm=0.25, RoHS=Y, Supplier 1=Digi-Key, SymbolVersion=2009-05-29, Technology="Thick Film", Tolerance_%=1, U/M=EA
R19: "RES, 510, 5%, 0.063 W, 0402", Manufacturer=Vishay-Dale, Power_W=0.063, Supplier Part Number 1=541-510JCT-ND, TempCo="200 ppm/C", Tolerance_%=5, Value1=5%, Value2=0.063W, Value_Code=510R, ValueDisplayed=510, ComponentLink1Description="Datasheet link", ComponentLink1URL=http://www.vishay.com/docs/20035/dcrcwe3.pdf, CompType=Resistor, EIA_Code=E24, LatestRevisionDate=2015-05-27, MountType=SMT, PackageReference=0402, PartNumber=CRCW0402510RJNED, Published=2008-06-26, Publisher="Texas Instruments", Res_ohm=510, RoHS=Y, Supplier 1=Digi-Key, Supplier 2=Mouser, Supplier 3=Farnell, Supplier Part Number 2=71-CRCW0402J-510-E3, Supplier Part Number 3=1570682, SymbolVersion=2009-05-29, Technology="Thick Film", U/M=EA, VDC_V=50
R20: "RES, 4.99 k, 1%, 0.063 W, 0402", Manufacturer=Vishay-Dale, Power_W=0.063, Supplier Part Number 1=541-4.99KLCT-ND, TempCo="100 ppm/C", Tolerance_%=1, Value1=1%, Value2=0.063W, Value_Code=4k99, ValueDisplayed=4.99k, ComponentLink1Description="Datasheet link", ComponentLink1URL=http://www.vishay.com/docs/20035/dcrcwe3.pdf, CompType=Resistor, EIA_Code=E96, LatestRevisionDate=2015-05-27, MountType=SMT, PackageReference=0402, PartNumber=CRCW04024K99FKED, Published=2008-06-26, Publisher="Texas Instruments", Res_ohm=4990, RoHS=Y, Supplier 1=Digi-Key, Supplier 2=Mouser, Supplier 3=Farnell, Supplier Part Number 2=71-CRCW0402-4.99K-E3, Supplier Part Number 3=1469715, SymbolVersion=2009-05-29, Technology="Thick Film", U/M=EA, VDC_V=50
RP1 RP2: library part CMP-0001777-2, "Trimming Potentiometer, 50K, 0.5W, TH", Manufacturer=Bourns, Supplier Part Number 1=3352T-503LF-ND, ComponentLink1Description="Datasheet URL", ComponentLink1URL=http://www.bourns.com/data/global/PDFs/3352.pdf, CompType=Trimmer, LatestRevisionDate=09/03/2017, MountType=TH, PackageReference=9.53x8.89mm, PartNumber=3352T-1-503LF, Publisher="Texas Instruments", RoHS=Y, Supplier 1=Digi-Key, Supplier 2=Newark, Supplier 3=Mouser, Supplier Part Number 2=32K8175, Supplier Part Number 3=652-3352T-1-503LF
SH-J1: library part CMP-0003761-1, "Shunt, 2.54mm, Gold, Black", Manufacturer="Wurth Elektronik", Supplier Part Number 1=732-2678-ND, ComponentLink1Description="Datasheet Link", ComponentLink1URL=http://katalog.we-online.de/em/datasheet/60900213421.pdf, CompType=Shunt, Key=60900213421, LatestRevisionDate=2017-03-09, MountType=N/A, PackageReference="Shunt, 2.54mm, Black", PartNumber=60900213421, Publisher="Texas Instruments", RoHS=Y, Supplier 1=Digi-Key, Supplier 2=Newark, Supplier 3=Mouser, Supplier Part Number 2=16T0609, Supplier Part Number 3=710-60900213421
TP1: "1mm Uninsulated Shorting Plug, 10.16mm spacing, TH", Manufacturer=Harwin, Supplier Part Number 1=952-1873-ND, ComponentLink1Description="Datasheet Link", ComponentLink1URL=http://cdn.harwin.com/pdfs/D3080-D3083.pdf, CompType="Jumper Wire", LatestRevisionDate=2015-06-10, MountType=TH, PackageReference="Shorting Plug, 10.16mm spacing, TH", PartNumber=D3082-05, Publisher="Texas Instruments", RoHS=Y, Supplier 1=Digi-Key, Supplier 2=Mouser, Supplier Part Number 2=855-D3082-05, SymbolCreator=a0799628, SymbolVersion=2014-05-16, U/M=EA
U1: library part CMP-0081845-1, "H-Bridge Motor Drivers With Integrated Current Sense and Regulation, PWP0016J (HTSSOP-16)", Alternate Manufacturer="Texas Instruments", Alternate PartNumber=DRV8874PWP, AEC Category=Q200, AEC Qualified=N, ComponentLink1Description="Datasheet Link", ComponentLink1URL=http://www.ti.com/lit/ds/symlink/drv8874.pdf, ComponentLink2Description="Product Folder", ComponentLink2URL=http://www.ti.com/product/drv8874, ComponentLink3Description="Online Datasheet", ComponentLink3URL=http://www.ti.com/product/drv8874/datasheet, CompType=IC, Manufacturer="Texas Instruments", MountType=SMT, PackageDescription=HTSSOP-16, PackageReference=PWP0016J, PartNumber=DRV8874PWPR, SizeArea_mm2=32, SizeAreaWB_mm2=58.8, SizeX_mm=6.4, SizeY_mm=5, SizeZ_mm=1.2
U2: library part "IC-STM32F103C8T6 _1", "ARM® Cortex®-M3 STM32F1 Microcontroller IC 32-Bit 72MHz 64KB (64K x 8) FLASH", Case/Package=48-LQFP, Manufacturer=STMicroelectronics, Supplier Part Number-1=497-6063-ND, Manufacturer Part Number=STM32F103C8T6, Supplier-1=Digikey
U3: library part CMP-0077328-2, "40-V Ultralow-Iq Low-Dropout Regulator, DBV0005A (SOT-23-5)", Alternate Manufacturer="Texas Instruments", AEC Category=Q200, AEC Qualified=N, ComponentLink1Description="Datasheet Link", ComponentLink1URL=http://www.ti.com/lit/ds/symlink/tps7b69.pdf, ComponentLink2Description="Product Folder", ComponentLink2URL=http://www.ti.com/product/tps7b69, ComponentLink3Description="Online Datasheet", ComponentLink3URL=http://www.ti.com/product/tps7b69/datasheet, CompType=IC, Manufacturer="Texas Instruments", MountType=SMT, PackageDescription=SOT-23-5, PackageReference=DBV0005A, PartNumber=TPS7B6933DBVR, RoHS=Y, SizeArea_mm2=8.12, SizeAreaWB_mm2=14.82, SizeX_mm=2.8, SizeY_mm=2.9, SizeZ_mm=1.45
U4: "USB to Serial UART, SSOP28", Manufacturer=FTDI, Supplier Part Number 1=768-1007-1-ND, ComponentLink1Description="Datasheet Link", ComponentLink1URL=http://www.ftdichip.com/Support/Documents/DataSheets/ICs/DS_FT232R.pdf, LatestRevisionDate=2015-06-10, MountType=SMT, PackageReference=SSOP28, PartNumber=FT232RL, Publisher="Texas Instruments", RoHS=Y, Supplier 1=Digi-Key, Supplier 2=Mouser, Supplier 3=Farnell, Supplier Part Number 2=895-FT232RL, Supplier Part Number 3=1146032, SymbolCreator=x0208326, SymbolVersion=2014-03-03
U5: "2-A 45-V 1/16-μstep Stepper Motor Driver With AutoTune, PWP0028C", Alternate Manufacturer="Texas Instruments", Alternate PartNumber=DRV8880PWP, ComponentLink1Description="Datasheet Link", ComponentLink1URL=https://sps06.itg.ti.com/sites/KMS/crossdivteams/altium/docs/ComponentDatasheets/SLVSD18_060515.pdf, CompType=IC, LatestRevisionDate=2015-06-11, Manufacturer="Texas Instruments", MountType=SMT, PackageReference=PWP0028C, PartNumber=DRV8880PWPR, Publisher="Texas Instruments", SymbolCreator=Altium, SymbolVersion=2015-05-04, U/M=EA
Y1: library part "CRYSTAL 32.768kH", "WE-XTAL Watch Crystal, SMT, IQXC-25, 32.768kHz, +/-10ppm", Case/Size Code=IQXC-25, Frequency Tolerance=+/-10ppm, Load Capacitance=9pF, Manufacturer="Wurth Elektronik", Manufacturer Part Number=830062558, Operating Temperature Max=85°C, Operating Temperature Min=-40°C, Category=Crystals, ComponentLink1Description="Website Link", ComponentLink1URL=https://www.we-online.com/redexpert/article/830062558?ad, ComponentLink2Description="Datasheet Link", ComponentLink2URL=https://www.we-online.com/redexpert/spec/830062558?ad, Frequency=32.768kHz, Height=0.6mm, Length=2mm, Match Code=WE-XTAL, Mount="Surface Mount", Packaging="Tape and Reel", Width=1.2mm
Y2: library part Crystals, "WE-XTAL Quartz Crystal, SMT, CFPX-180, 25MHz, +/-10ppm", Case/Size Code=CFPX-180, Frequency Stability=+/-15ppm, Frequency Tolerance=+/-10ppm, Load Capacitance=10pF, Manufacturer="Wurth Elektronik", Manufacturer Part Number=830108174209, Operating Temperature Max=85°C, Operating Temperature Min=-40°C, Category=Crystals, ComponentLink1Description="Website Link", ComponentLink1URL=https://www.we-online.com/redexpert/article/830108174209?ad, ComponentLink2Description="Datasheet Link", ComponentLink2URL=https://www.we-online.com/redexpert/spec/830108174209?ad, Frequency=25MHz, Height=0.8mm, Length=3.4mm, Match Code=WE-XTAL, Mount="Surface Mount", Packaging="Tape and Reel", Width=2.7mm

## Via types
v1: diameter 0.6, hole 0.3, Top Layer to Bottom Layer, 93 vias
v2: diameter 0.5, hole 0.2, Top Layer to Bottom Layer, 18 vias
v3: diameter 0.5, hole 0.2, Top Layer to Bottom Layer, tented both sides, 12 vias
v4: diameter 3, hole 2, Top Layer to Bottom Layer, 4 vias

## Nets (pads, with @x,y where several pads share a name; then routed paths per layer and width w, separated by ;. In a path a pad name is that pad's centre, name@x,y a point inside that pad or via, vN(x,y) a via of type N, cw(c..) or ccw(c..) an arc to the next point about the centre after c; other vN are vias at no path point)
1nFAULT: D1.1 R3.2 U1.4 | length 7.7
  Top Layer w0.3: U1.4@149.174,55.425 149.249,55.5 149.249,56.73 149.347,56.828 149.347,57.022 149.866,57.54 149.866,57.895 150.366,58.395 150.471,58.395 150.971,58.895 154.113,58.895 D1.1@154.318,59.1
1nSLEEP: U1.3 U2.13 | length 28.9
  Top Layer w0.254: U1.3@149.824,55.425 149.824,56.824 150.14,57.14 150.554,57.14 v1(150.62,57.206) ; U2.13@161.85,71.513 161.85,72.85 v1(161.9,72.9)
  Bottom Layer w0.254: v1(150.62,57.206) 150.675,57.151 150.675,56.525 151.5,55.7 152.551,55.7 153.9,57.049 153.9,60.187 159.84,66.127 161.114,66.127 162.327,67.34 162.327,69.76 161.9,70.187 v1(161.9,72.9)
8xV3P3: C20.1 U5.15 | length 1.8
  Top Layer w0.3: C20.1@139.85,62.05 139.85,63.159 139.95,63.259 U5.15@139.95,63.775
+3V3: J4.4
AISEN: R17.2 U5.6 | length 4.3
  Top Layer w0.254: R17.2@144.525,73.35 144.854,73.35 145.327,72.877 145.327,71.271 145.323,71.267 145.323,70.454 145.248,70.379 145.248,70.301 145.15,70.203 U5.6@145.15,69.675
AOUT1: J9.1 U5.5 | length 22.7
  Top Layer w0.3: U5.5@145.8,69.675 145.829,69.704 145.829,70.285 145.875,70.331 145.875,70.388 145.973,70.486 145.973,72.173 v1(146,72.2)
  Bottom Layer w0.3: J9.1@134.15,87.405 136.5,85.055 136.5,82 145.371,73.129 145.371,72.829 v1(146,72.2)
AOUT2: J9.2 U5.7 | length 18.7
  Top Layer w0.3: U5.7@144.5,69.675 144.5,71.919 144.7,72.119 v1(144.7,72.2)
  Bottom Layer w0.3: J9.2@134.15,83.9 134.15,83.643 144.7,73.093 v1(144.7,72.2)
BISEN: R18.2 U5.9 | length 4.6
  Top Layer w0.254: R18.2@141.3,73.475 141.384,73.475 141.857,73.002 141.857,72.643 143.173,71.327 143.173,69.702 U5.9@143.2,69.675
BOOT0: J7.3 R9.2 | length 21.1